# EAGLE board Main_Board (EAGLE 9.1.3), part 1 of 2
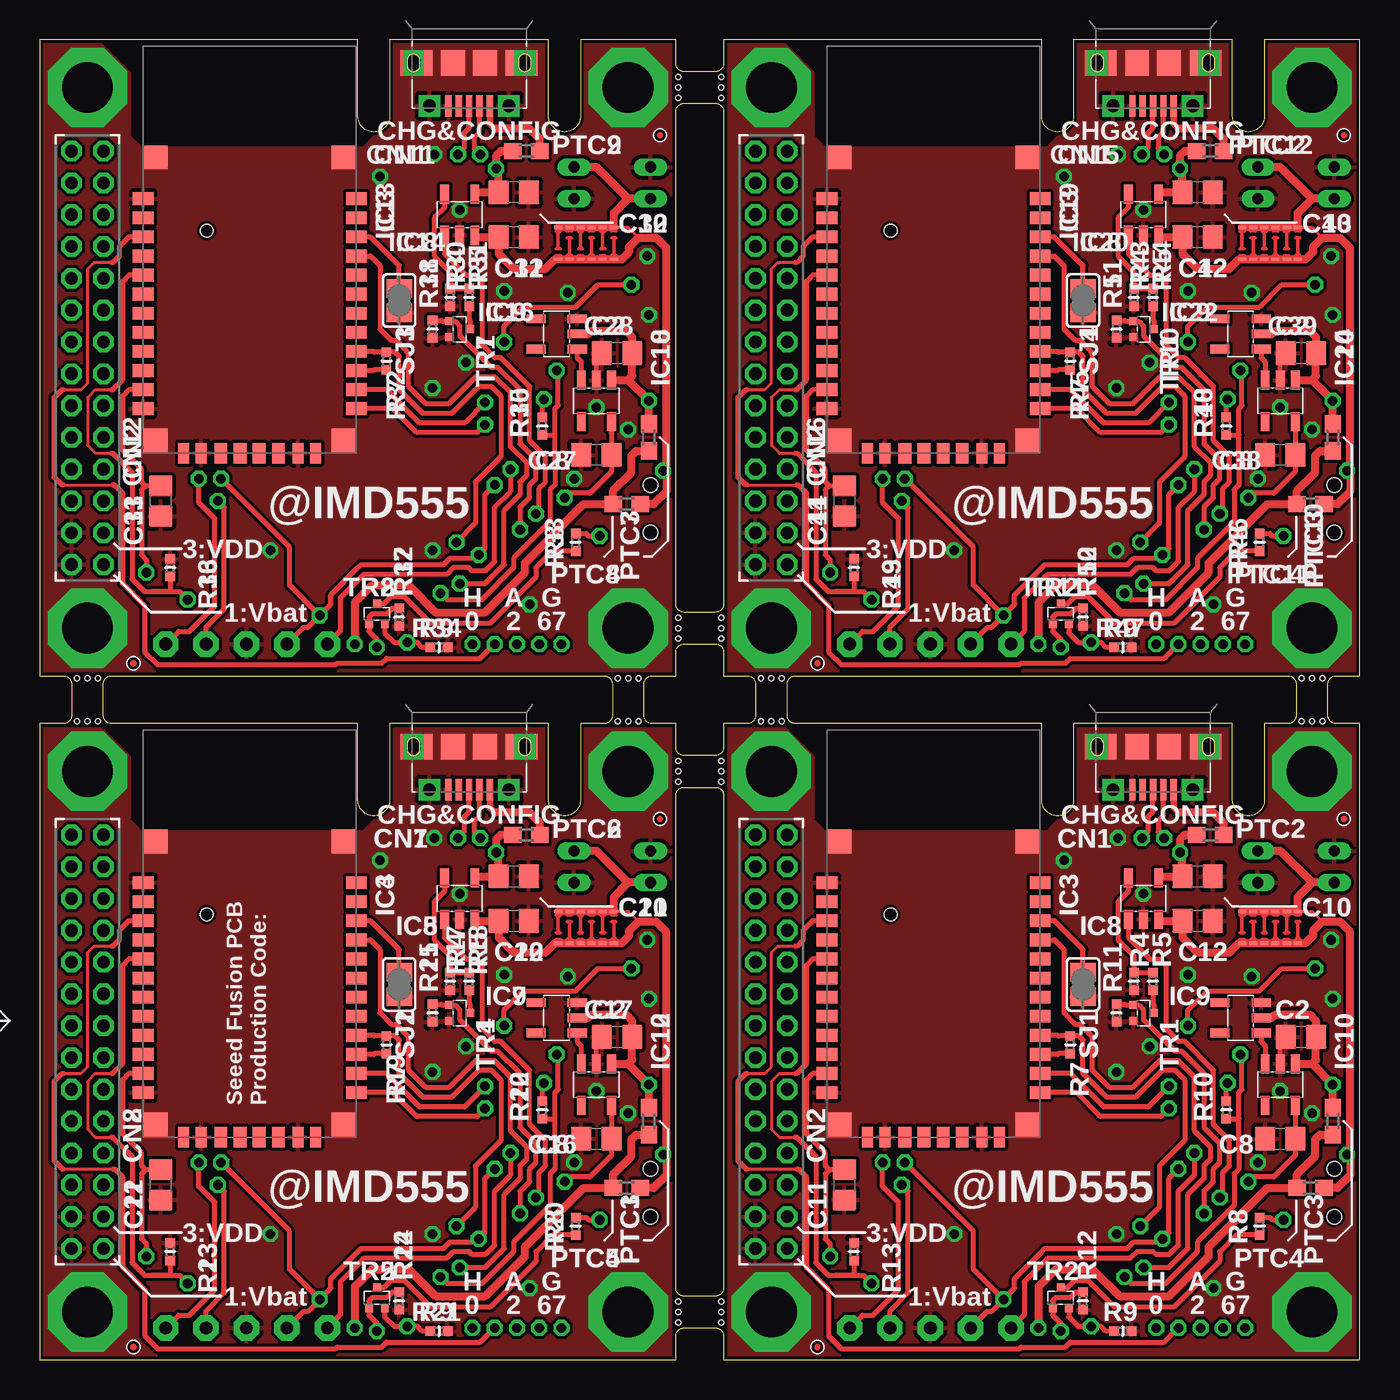
[diagram p0: board, top side]
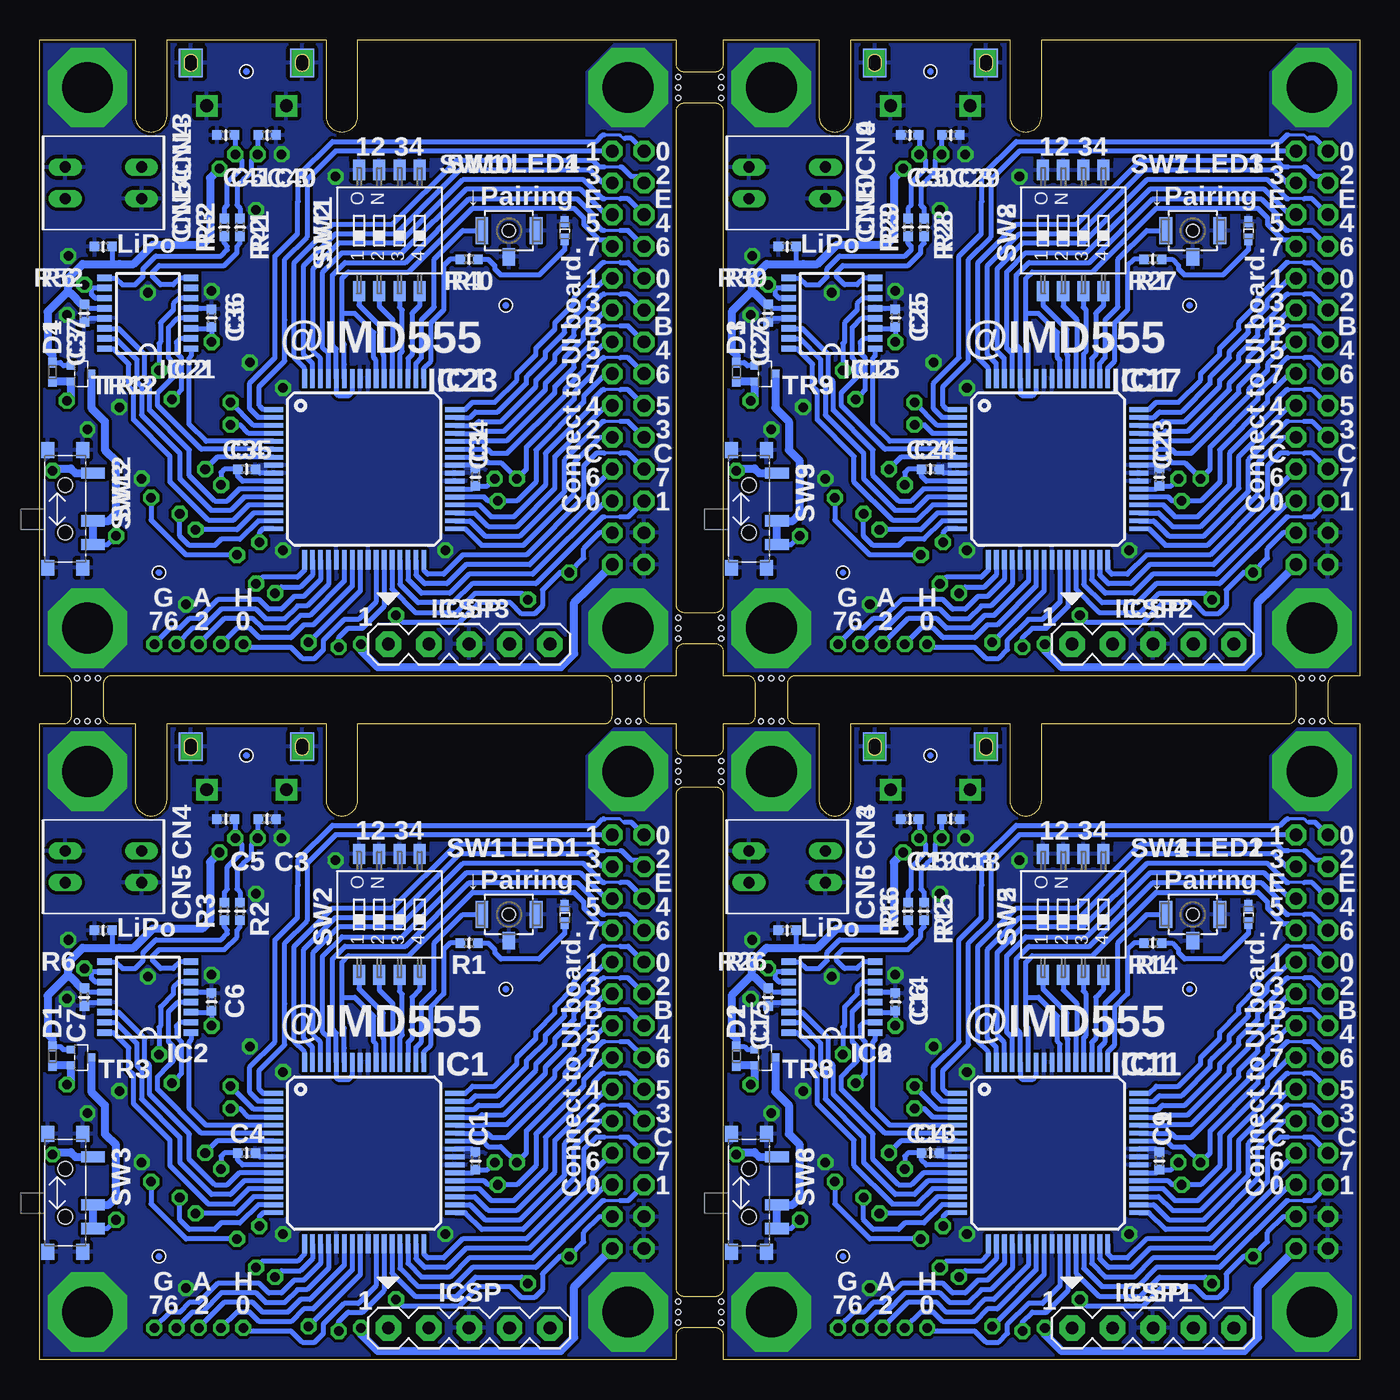
[diagram p1: board, bottom side, seen from below]

Size 83 x 83 mm. Coordinates in mm from the lower left corner, seen from the top.
Outline: 43,0 83,0 83,40 81.5,40 arc-90 81,40.5 81,42.5 arc-90 81.5,43 83,43 83,83 77,83 77,78.2 arc-90 76,77.2 arc-90 75,78.2 75,83 65,83 65,78.2 arc-90 64,77.2 arc-90 63,78.2 63,83 43,83 43,81.5 arc-90 42.5,81 40.5,81 arc-90 40,81.5 40,83 34,83 34,78.2 arc-90 33,77.2 arc-90 32,78.2 32,83 22,83 22,78.2 arc-90 21,77.2 arc-90 20,78.2 20,83 0,83 0,43 1.5,43 arc-90 2,42.5 2,40.5 arc-90 1.5,40 0,40 0,0 40,0 40,1.5 arc-90 40.5,2 42.5,2 arc-90 43,1.5 43,0
Outline: 44.5,40 43,40 43,38.5 arc-90 42.5,38 40.5,38 arc-90 40,38.5 40,40 38.5,40 arc-90 38,40.5 38,42.5 arc-90 38.5,43 40,43 40,44.5 arc-90 40.5,45 42.5,45 arc-90 43,44.5 43,43 44.5,43 arc-90 45,42.5 45,40.5 arc-90 44.5,40
Outline: 43,35.5 43,4.5 arc-90 42.5,4 40.5,4 arc-90 40,4.5 40,35.5 arc-90 40.5,36 42.5,36 arc-90 43,35.5
Outline: 4.5,40 arc-90 4,40.5 4,42.5 arc-90 4.5,43 35.5,43 arc-90 36,42.5 36,40.5 arc-90 35.5,40 34,40 34,35.2 arc-90 33,34.2 arc-90 32,35.2 32,40 22,40 22,35.2 arc-90 21,34.2 arc-90 20,35.2 20,40 4.5,40
Outline: 79,40.5 arc-90 78.5,40 77,40 77,35.2 arc-90 76,34.2 arc-90 75,35.2 75,40 65,40 65,35.2 arc-90 64,34.2 arc-90 63,35.2 63,40 47.5,40 arc-90 47,40.5 47,42.5 arc-90 47.5,43 78.5,43 arc-90 79,42.5 79,40.5
Outline: 40,47.5 40,78.5 arc-90 40.5,79 42.5,79 arc-90 43,78.5 43,47.5 arc-90 42.5,47 40.5,47 arc-90 40,47.5
Copper layers (1*16): Top 0.035mm / dielectric 1.5mm / Bottom 0.035mm
Design rules "SeeedStudio_2layer_DRU_no_angle_20140221_IMD555 *": minimum track width 0.2mm, minimum drill 0.3mm, track to track 0.2mm, track to pad 0.16mm, pad to pad 0.2mm, via to via 0.2mm, smd to smd 0mil, copper to edge 0.2mm, drill to drill 10mil, minimum pad ring 0.2mm, minimum via ring 0.2mm, stop-mask expansion 0.03mm, vias tented up to drill 5mm, thermal gap 10mil
Net classes: 1 Vbat: clearance 0.3 mm
Holes 0.3 mm at 42.85,37 42.85,3 40.15,3 40.15,37 3,40.15 37,40.15 80,40.15 46,40.15 40.15,46 40.15,80 42.85,80 42.85,46 80,42.85 46,42.85 3,42.85 37,42.85 2.35,40.15 36.35,40.15 79.35,40.15 45.35,40.15 79.35,42.85 45.35,42.85 2.35,42.85 36.35,42.85 3.65,40.15 37.65,40.15 80.65,40.15 46.65,40.15 80.65,42.85 46.65,42.85 3.65,42.85 37.65,42.85 42.85,36.35 42.85,2.35 40.15,2.35 40.15,36.35 40.15,45.35 40.15,79.35 42.85,79.35 42.85,45.35 42.85,37.65 42.85,3.65 40.15,3.65 40.15,37.65 40.15,46.65 40.15,80.65 42.85,80.65 42.85,46.65
tRestrict: area 0,39.8 to 83,43.2; area 39.8,0 to 43.2,83; area 46.8,33.4 to 64.8,40; area 3.8,33.4 to 21.8,40; area 3.8,76.4 to 21.8,83; area 46.8,76.4 to 64.8,83; 8 lines
bRestrict: area 39.8,0 to 43.2,83; area 0,39.8 to 83,43.2; area 46.8,33.4 to 64.8,40; area 3.8,33.4 to 21.8,40; area 3.8,76.4 to 21.8,83; area 46.8,76.4 to 64.8,83; 20 lines

## Footprints (pad centres in the part's own frame; a part is rotated, then mirrored left to right if it is on the bottom)
C0402-SS = smd 0.6 x 0.6: 1 -0.55,0; 2 0.55,0
C0805 = smd 1.3 x 1.5: 1 -0.95,0; 2 0.95,0
10118194-0001LF = smd 0.4 x 1.35: P$1 -1.3,4.15; P$2 -0.65,4.15; P$3 0,4.15; P$4 0.65,4.15; P$5 1.3,4.15 | smd 1.5 x 1.8 bottom: P$6 -3.5,1.45; P$7 3.5,1.45 | drill 0.8 pad 1.35 square: S1 -2.5,4.15; S2 2.5,4.15 | drill 0.8 pad 1.3 square: S3 -3.5,1.6; S4 -3.5,1.3; S9 3.5,1.6; S10 3.5,1.3 | smd 2 x 1.6: S5 -3.3,1.45; S8 3.3,1.45 | smd 1.5 x 1.6: S6 -1,1.45; S7 1,1.45
2MM_14X2_R = drill 0.8 pad 1.3 octagon: 1 13,1; 2 13,-1; 3 11,1; 4 11,-1; 5 9,1; 6 9,-1; 7 7,1; 8 7,-1; 9 5,1; 10 5,-1; 11 3,1; 12 3,-1; 13 1,1; 14 1,-1; 15 -1,1; 16 -1,-1; 17 -3,1; 18 -3,-1; 19 -5,1; 20 -5,-1; 21 -7,1; 22 -7,-1; 23 -9,1; 24 -9,-1; 25 -11,1; 26 -11,-1; 27 -13,1; 28 -13,-1
PH-2_S = drill 0.7 long: 1 1,0; 2 -1,0
VMN2 = smd 0.65 x 0.55: A 0.6,0; C -0.6,0
FUSE_PAT1 = smd 0.2 x 0.5: P$1 -1,0; P$2 1,0
TQFP64-10X10 = smd 1.2 x 0.3: 1 -5.7,3.75; 2 -5.7,3.25; 3 -5.7,2.75; 4 -5.7,2.25; 5 -5.7,1.75; 6 -5.7,1.25; 7 -5.7,0.75; 8 -5.7,0.25; 9 -5.7,-0.25; 10 -5.7,-0.75; 11 -5.7,-1.25; 12 -5.7,-1.75; 13 -5.7,-2.25; 14 -5.7,-2.75; 15 -5.7,-3.25; 16 -5.7,-3.75; 33 5.7,-3.75; 34 5.7,-3.25; 35 5.7,-2.75; 36 5.7,-2.25; 37 5.7,-1.75; 38 5.7,-1.25; 39 5.7,-0.75; 40 5.7,-0.25; 41 5.7,0.25; 42 5.7,0.75; 43 5.7,1.25; 44 5.7,1.75; 45 5.7,2.25; 46 5.7,2.75; 47 5.7,3.25; 48 5.7,3.75 | smd 0.3 x 1.2: 17 -3.75,-5.7; 18 -3.25,-5.7; 19 -2.75,-5.7; 20 -2.25,-5.7; 21 -1.75,-5.7; 22 -1.25,-5.7; 23 -0.75,-5.7; 24 -0.25,-5.7; 25 0.25,-5.7; 26 0.75,-5.7; 27 1.25,-5.7; 28 1.75,-5.7; 29 2.25,-5.7; 30 2.75,-5.7; 31 3.25,-5.7; 32 3.75,-5.7; 49 3.75,5.7; 50 3.25,5.7; 51 2.75,5.7; 52 2.25,5.7; 53 1.75,5.7; 54 1.25,5.7; 55 0.75,5.7; 56 0.25,5.7; 57 -0.25,5.7; 58 -0.75,5.7; 59 -1.25,5.7; 60 -1.75,5.7; 61 -2.25,5.7; 62 -2.75,5.7; 63 -3.25,5.7; 64 -3.75,5.7
SSOP16 = smd 0.914 x 0.406: 1 -2.718,2.223; 2 -2.718,1.587; 3 -2.718,0.953; 4 -2.718,0.318; 5 -2.718,-0.318; 6 -2.718,-0.953; 7 -2.718,-1.587; 8 -2.718,-2.223; 9 2.718,-2.223; 10 2.718,-1.587; 11 2.718,-0.953; 12 2.718,-0.318; 13 2.718,0.318; 14 2.718,0.953; 15 2.718,1.587; 16 2.718,2.223
RN-42 = smd 1.3 x 0.8: 1 -6.7,16; 2 -6.7,14.8; 3 -6.7,13.6; 4 -6.7,12.4; 5 -6.7,11.2; 6 -6.7,10; 7 -6.7,8.8; 8 -6.7,7.6; 9 -6.7,6.4; 10 -6.7,5.2; 11 -6.7,4; 12 -6.7,2.8; 13 6.7,2.8; 14 6.7,4; 15 6.7,5.2; 16 6.7,6.4; 17 6.7,7.6; 18 6.7,8.8; 19 6.7,10; 20 6.7,11.2; 21 6.7,12.4; 22 6.7,13.6; 23 6.7,14.8; 24 6.7,16 | smd 0.7 x 1.3: 28 3.05,0; 29 -3.05,0; 30 4.15,0; 35 -4.15,0 | smd 0.8 x 1.3: 31 1.8,0; 32 0.6,0; 33 -0.6,0; 34 -1.8,0 | smd 1.5 x 1.5: SHIELD -5.9,18.6; SHIELD@1 -5.9,0.8; SHIELD@2 5.9,0.8; SHIELD@3 5.9,18.6
SOT23-5L = smd 0.55 x 1.2: 1 -0.95,-1.3; 2 0,-1.3; 3 0.95,-1.3; 4 0.95,1.3; 5 -0.95,1.3
MA05-1 = drill 0.8 pad 1.6 octagon: 1 -5.08,0; 2 -2.54,0; 3 0,0; 4 2.54,0; 5 5.08,0
CHIP-LED1005 = smd 0.5 x 0.7: A 0,-0.55; C 0,0.55
R0603 = smd 1.1 x 1: 1 -0.85,0; 2 0.85,0
R0402-SS = smd 0.6 x 0.6: 1 -0.55,0; 2 0.55,0
SJ = smd 1.168 x 1.6: 1 -0.762,0; 2 0.762,0
B3U-1100P-B = smd 0.8 x 1.7: P$1 -1.7,0; P$2 1.7,0 | smd 0.8 x 1.1: P$3 0,-1.65 | hole 0.8: 0,0
CHS-04B = smd 0.76 x 1.27: 1 0,-3.81; 2 1.27,-3.81; 3 2.54,-3.81; 4 3.81,-3.81; 5 3.81,3.81; 6 2.54,3.81; 7 1.27,3.81; 8 0,3.81
MA12R = smd 0.7 x 1.5: P$1 -2.25,1.75; P$2 0.75,1.75; P$3 2.25,1.75 | smd 1 x 0.8: P$4 -3.7,1.1; P$5 -3.7,-1.1; P$6 3.7,-1.1; P$7 3.7,1.1 | hole 0.9: -1.5,0; 1.5,0
SOT523 = smd 0.5 x 0.5: 1 -0.5,-0.65; 2 0.5,-0.65; 3 0,0.65

## Placement (x,y rotation side)
C1  0.1u  [C0402-SS]  55.6,12.5 270 bottom
C2  4.7u  [C0805]  79.3,20.3 180 top
C3  47p  [C0402-SS]  71.3,34 180 bottom
C4  0.1u  [C0402-SS]  70,13 180 bottom
C5  47p  [C0402-SS]  68.7,34 0 bottom
C6  0.1u  [C0402-SS]  72.2,22.5 90 bottom
C7  0.1u  [C0402-SS]  80.2,22.8 270 bottom
C8  4.7u  [C0805]  78,13.9 180 top
C9  0.1u  [C0402-SS]  12.6,12.5 270 bottom
C10  4.7u  [C0805]  72.8,30.4 0 top
C11  4.7u  [C0805]  50.6,11 270 top
C12  4.7u  [C0805]  72.8,27.6 0 top
C13  0.1u  [C0402-SS]  27,13 180 bottom
C14  0.1u  [C0402-SS]  29.2,22.5 90 bottom
C15  0.1u  [C0402-SS]  37.2,22.8 270 bottom
C16  4.7u  [C0805]  35,13.9 180 top
C17  4.7u  [C0805]  36.3,20.3 180 top
C18  47p  [C0402-SS]  28.3,34 180 bottom
C19  47p  [C0402-SS]  25.7,34 0 bottom
C20  4.7u  [C0805]  29.8,27.6 0 top
C21  4.7u  [C0805]  29.8,30.4 0 top
C22  4.7u  [C0805]  7.6,11 270 top
C23  0.1u  [C0402-SS]  12.6,55.5 270 bottom
C24  0.1u  [C0402-SS]  27,56 180 bottom
C25  0.1u  [C0402-SS]  29.2,65.5 90 bottom
C26  0.1u  [C0402-SS]  37.2,65.8 270 bottom
C27  4.7u  [C0805]  35,56.9 180 top
C28  4.7u  [C0805]  36.3,63.3 180 top
C29  47p  [C0402-SS]  28.3,77 180 bottom
C30  47p  [C0402-SS]  25.7,77 0 bottom
C31  4.7u  [C0805]  29.8,70.6 0 top
C32  4.7u  [C0805]  29.8,73.4 0 top
C33  4.7u  [C0805]  7.6,54 270 top
C34  0.1u  [C0402-SS]  55.6,55.5 270 bottom
C35  0.1u  [C0402-SS]  70,56 180 bottom
C36  0.1u  [C0402-SS]  72.2,65.5 90 bottom
C37  0.1u  [C0402-SS]  80.2,65.8 270 bottom
C38  4.7u  [C0805]  78,56.9 180 top
C39  4.7u  [C0805]  79.3,63.3 180 top
C40  47p  [C0402-SS]  71.3,77 180 bottom
C41  47p  [C0402-SS]  68.7,77 0 bottom
C42  4.7u  [C0805]  72.8,70.6 0 top
C43  4.7u  [C0805]  72.8,73.4 0 top
C44  4.7u  [C0805]  50.6,54 270 top
CN1  microUSB  [10118194-0001LF]  70,40 180 top
CN2  2X14R  [2MM_14X2_R]  46,20 270 top
CN3  [PH-2_S]  33.6,31 90 bottom
CN4  [PH-2_S]  76.6,31 90 bottom
CN5  [PH-2_S]  81.4,31 270 bottom
CN6  [PH-2_S]  38.4,31 270 bottom
CN7  microUSB  [10118194-0001LF]  27,40 180 top
CN8  2X14R  [2MM_14X2_R]  3,20 270 top
CN9  [PH-2_S]  33.6,74 90 bottom
CN10  [PH-2_S]  38.4,74 270 bottom
CN11  microUSB  [10118194-0001LF]  27,83 180 top
CN12  2X14R  [2MM_14X2_R]  3,63 270 top
CN13  [PH-2_S]  76.6,74 90 bottom
CN14  [PH-2_S]  81.4,74 270 bottom
CN15  microUSB  [10118194-0001LF]  70,83 180 top
CN16  2X14R  [2MM_14X2_R]  46,63 270 top
D1  [VMN2]  82.2,19.1 90 bottom
D2  [VMN2]  39.2,19.1 90 bottom
D3  [VMN2]  39.2,62.1 90 bottom
D4  [VMN2]  82.2,62.1 90 bottom
F1  FUSEPAT0.2  [FUSE_PAT1]  78.4,27.2 90 top
F2  FUSEPAT0.2  [FUSE_PAT1]  77.7,27.2 270 top
F3  FUSEPAT0.2  [FUSE_PAT1]  77,27.2 90 top
F4  FUSEPAT0.2  [FUSE_PAT1]  76.3,27.2 270 top
F5  FUSEPAT0.2  [FUSE_PAT1]  75.6,27.2 90 top
F6  FUSEPAT0.2  [FUSE_PAT1]  79.1,27.2 270 top
F7  FUSEPAT0.2  [FUSE_PAT1]  35.4,27.2 90 top
F8  FUSEPAT0.2  [FUSE_PAT1]  34.7,27.2 270 top
F9  FUSEPAT0.2  [FUSE_PAT1]  34,27.2 90 top
F10  FUSEPAT0.2  [FUSE_PAT1]  33.3,27.2 270 top
F11  FUSEPAT0.2  [FUSE_PAT1]  32.6,27.2 90 top
F12  FUSEPAT0.2  [FUSE_PAT1]  36.1,27.2 270 top
F13  FUSEPAT0.2  [FUSE_PAT1]  35.4,70.2 90 top
F14  FUSEPAT0.2  [FUSE_PAT1]  34.7,70.2 270 top
F15  FUSEPAT0.2  [FUSE_PAT1]  34,70.2 90 top
F16  FUSEPAT0.2  [FUSE_PAT1]  33.3,70.2 270 top
F17  FUSEPAT0.2  [FUSE_PAT1]  32.6,70.2 90 top
F18  FUSEPAT0.2  [FUSE_PAT1]  36.1,70.2 270 top
F19  FUSEPAT0.2  [FUSE_PAT1]  78.4,70.2 90 top
F20  FUSEPAT0.2  [FUSE_PAT1]  77.7,70.2 270 top
F21  FUSEPAT0.2  [FUSE_PAT1]  77,70.2 90 top
F22  FUSEPAT0.2  [FUSE_PAT1]  76.3,70.2 270 top
F23  FUSEPAT0.2  [FUSE_PAT1]  75.6,70.2 90 top
F24  FUSEPAT0.2  [FUSE_PAT1]  79.1,70.2 270 top
IC1  PIC18LF67K40  [TQFP64-10X10]  62.6,13 0 bottom
IC2  FT230X  [SSOP16]  76.2,22.8 180 bottom
IC3  RN42  [RN-42]  56.2,14 0 top
IC4  RN42  [RN-42]  13.2,14 0 top
IC5  MCP73832  [SOT23-5L]  26.4,29 0 top
IC6  FT230X  [SSOP16]  33.2,22.8 180 bottom
IC7  BD4931G  [SOT23-5L]  32.5,21.5 90 top
IC8  MCP73832  [SOT23-5L]  69.4,29 0 top
IC9  BD4931G  [SOT23-5L]  75.5,21.5 90 top
IC10  NCP551  [SOT23-5L]  78,17.3 180 top
IC11  PIC18LF67K40  [TQFP64-10X10]  19.6,13 0 bottom
IC12  NCP551  [SOT23-5L]  35,17.3 180 top
IC13  RN42  [RN-42]  13.2,57 0 top
IC14  MCP73832  [SOT23-5L]  26.4,72 0 top
IC15  FT230X  [SSOP16]  33.2,65.8 180 bottom
IC16  BD4931G  [SOT23-5L]  32.5,64.5 90 top
IC17  PIC18LF67K40  [TQFP64-10X10]  19.6,56 0 bottom
IC18  NCP551  [SOT23-5L]  35,60.3 180 top
IC19  RN42  [RN-42]  56.2,57 0 top
IC20  MCP73832  [SOT23-5L]  69.4,72 0 top
IC21  FT230X  [SSOP16]  76.2,65.8 180 bottom
IC22  BD4931G  [SOT23-5L]  75.5,64.5 90 top
IC23  PIC18LF67K40  [TQFP64-10X10]  62.6,56 0 bottom
IC24  NCP551  [SOT23-5L]  78,60.3 180 top
ICSP  (Not mounting)  [MA05-1]  56,2 0 bottom
ICSP1  (Not mounting)  [MA05-1]  13,2 0 bottom
ICSP2  (Not mounting)  [MA05-1]  13,45 0 bottom
ICSP3  (Not mounting)  [MA05-1]  56,45 0 bottom
LED1  Blue  [CHIP-LED1005]  50,28 0 bottom
LED2  Blue  [CHIP-LED1005]  7,28 0 bottom
LED3  Blue  [CHIP-LED1005]  7,71 0 bottom
LED4  Blue  [CHIP-LED1005]  50,71 0 bottom
PTC1  250mA 100mA 0ZCM0010FF2G  [R0603]  38.3,15 270 top
PTC2  250mA 100mA 0ZCM0010FF2G  [R0603]  73.6,33 180 top
PTC3  250mA 100mA 0ZCM0010FF2G  [R0603]  81.3,15 270 top
PTC4  250mA 100mA 0ZCM0010FF2G  [R0603]  79.9,10.8 180 top
PTC5  250mA 100mA 0ZCM0010FF2G  [R0603]  36.9,10.8 180 top
PTC6  250mA 100mA 0ZCM0010FF2G  [R0603]  30.6,33 180 top
PTC7  250mA 100mA 0ZCM0010FF2G  [R0603]  38.3,58 270 top
PTC8  250mA 100mA 0ZCM0010FF2G  [R0603]  36.9,53.8 180 top
PTC9  250mA 100mA 0ZCM0010FF2G  [R0603]  30.6,76 180 top
PTC10  250mA 100mA 0ZCM0010FF2G  [R0603]  81.3,58 270 top
PTC11  250mA 100mA 0ZCM0010FF2G  [R0603]  79.9,53.8 180 top
PTC12  250mA 100mA 0ZCM0010FF2G  [R0603]  73.6,76 180 top
R1  1000 or 330  [R0402-SS]  56,26.2 0 bottom
R2  27  [R0402-SS]  70.4,28.2 90 bottom
R3  27  [R0402-SS]  71.4,28.2 90 bottom
R4  10k  [R0402-SS]  68.8,23.8 90 top
R5  3.3k  [R0402-SS]  70,23.8 90 top
R6  33k  [R0402-SS]  79,27 0 bottom
R7  10k  [R0402-SS]  64.8,19.8 270 top
R8  33k  [R0402-SS]  76.7,8.4 90 top
R9  10k  [R0402-SS]  68.1,1.8 180 top
R10  10k  [R0402-SS]  74.6,15.7 90 top
R11  100k  [R0402-SS]  67.7,21.8 90 top
R12  100k  [R0402-SS]  65.6,3.7 90 top
R13  100k  [R0402-SS]  51.2,6.8 90 top
R14  1000 or 330  [R0402-SS]  13,26.2 0 bottom
R15  27  [R0402-SS]  27.4,28.2 90 bottom
R16  27  [R0402-SS]  28.4,28.2 90 bottom
R17  10k  [R0402-SS]  25.8,23.8 90 top
R18  3.3k  [R0402-SS]  27,23.8 90 top
R19  10k  [R0402-SS]  21.8,19.8 270 top
R20  33k  [R0402-SS]  33.7,8.4 90 top
R21  10k  [R0402-SS]  25.1,1.8 180 top
R22  10k  [R0402-SS]  31.6,15.7 90 top
R23  100k  [R0402-SS]  8.2,6.8 90 top
R24  100k  [R0402-SS]  22.6,3.7 90 top
R25  100k  [R0402-SS]  24.7,21.8 90 top
R26  33k  [R0402-SS]  36,27 0 bottom
R27  1000 or 330  [R0402-SS]  13,69.2 0 bottom
R28  27  [R0402-SS]  27.4,71.2 90 bottom
R29  27  [R0402-SS]  28.4,71.2 90 bottom
R30  10k  [R0402-SS]  25.8,66.8 90 top
R31  3.3k  [R0402-SS]  27,66.8 90 top
R32  10k  [R0402-SS]  21.8,62.8 270 top
R33  33k  [R0402-SS]  33.7,51.4 90 top
R34  10k  [R0402-SS]  25.1,44.8 180 top
R35  10k  [R0402-SS]  31.6,58.7 90 top
R36  100k  [R0402-SS]  8.2,49.8 90 top
R37  100k  [R0402-SS]  22.6,46.7 90 top
R38  100k  [R0402-SS]  24.7,64.8 90 top
R39  33k  [R0402-SS]  36,70 0 bottom
R40  1000 or 330  [R0402-SS]  56,69.2 0 bottom
R41  27  [R0402-SS]  70.4,71.2 90 bottom
R42  27  [R0402-SS]  71.4,71.2 90 bottom
R43  10k  [R0402-SS]  68.8,66.8 90 top
R44  3.3k  [R0402-SS]  70,66.8 90 top
R45  10k  [R0402-SS]  64.8,62.8 270 top
R46  33k  [R0402-SS]  76.7,51.4 90 top
R47  10k  [R0402-SS]  68.1,44.8 180 top
R48  10k  [R0402-SS]  74.6,58.7 90 top
R49  100k  [R0402-SS]  51.2,49.8 90 top
R50  100k  [R0402-SS]  65.6,46.7 90 top
R51  100k  [R0402-SS]  67.7,64.8 90 top
R52  33k  [R0402-SS]  79,70 0 bottom
SJ1  (Don't short)  [SJ]  65.6,23.6 270 top
SJ2  (Don't short)  [SJ]  22.6,23.6 270 top
SJ3  (Don't short)  [SJ]  22.6,66.6 270 top
SJ4  (Don't short)  [SJ]  65.6,66.6 270 top
SW1  B3U-1100P-B  [B3U-1100P-B]  53.5,28 0 bottom
SW2  CHS-04B  [CHS-04B]  62.92,28 0 bottom
SW3  MA12R  [MA12R]  81.4,10.5 270 bottom
SW4  B3U-1100P-B  [B3U-1100P-B]  10.5,28 0 bottom
SW5  CHS-04B  [CHS-04B]  19.92,28 0 bottom
SW6  MA12R  [MA12R]  38.4,10.5 270 bottom
SW7  B3U-1100P-B  [B3U-1100P-B]  10.5,71 0 bottom
SW8  CHS-04B  [CHS-04B]  19.92,71 0 bottom
SW9  MA12R  [MA12R]  38.4,53.5 270 bottom
SW10  B3U-1100P-B  [B3U-1100P-B]  53.5,71 0 bottom
SW11  CHS-04B  [CHS-04B]  62.92,71 0 bottom
SW12  MA12R  [MA12R]  81.4,53.5 270 bottom
TR1  DMG1012T-7  [SOT523]  69.4,21.8 270 top
TR2  DMG1012T-7  [SOT523]  64.2,3.9 0 top
TR3  PMOSSOT523  [SOT523]  80.4,19 270 bottom
TR4  DMG1012T-7  [SOT523]  26.4,21.8 270 top
TR5  DMG1012T-7  [SOT523]  21.2,3.9 0 top
TR6  PMOSSOT523  [SOT523]  37.4,19 270 bottom
TR7  DMG1012T-7  [SOT523]  26.4,64.8 270 top
TR8  DMG1012T-7  [SOT523]  21.2,46.9 0 top
TR9  PMOSSOT523  [SOT523]  37.4,62 270 bottom
TR10  DMG1012T-7  [SOT523]  69.4,64.8 270 top
TR11  DMG1012T-7  [SOT523]  64.2,46.9 0 top
TR12  PMOSSOT523  [SOT523]  80.4,62 270 bottom
U$1  [PCB_CHECK]  48.9,0.8 0 top
U$2  [PCB_CHECK]  5.9,0.8 0 top
U$3  [PCB_CHECK]  82,34 0 top
U$4  [PCB_CHECK]  39,34 0 top
U$5  [PCB_CHECK]  32.5,6.5 0 bottom
U$6  [PCB_CHECK]  75.5,6.5 0 bottom
U$7  [PCB_CHECK]  10.7,23.3 0 bottom
U$8  [PCB_CHECK]  53.7,23.3 0 bottom
U$9  [PCB_CHECK]  70,38 0 bottom
U$10  [PCB_CHECK]  27,38 0 bottom
U$11  [PCB_CHECK]  5.9,43.8 0 top
U$12  [PCB_CHECK]  39,77 0 top
U$13  [PCB_CHECK]  32.5,49.5 0 bottom
U$14  [PCB_CHECK]  10.7,66.3 0 bottom
U$15  [PCB_CHECK]  27,81 0 bottom
U$16  [PCB_CHECK]  48.9,43.8 0 top
U$17  [PCB_CHECK]  82,77 0 top
U$18  [PCB_CHECK]  75.5,49.5 0 bottom
U$19  [PCB_CHECK]  53.7,66.3 0 bottom
U$20  [PCB_CHECK]  70,81 0 bottom

## Library data of the parts
C1-C44 PTC1-PTC12 R1-R52 = 2 RCL
CN1 CN7 CN11 CN15 IC1 IC3-IC5 IC7-IC14 IC16-IC20 IC22-IC24 LED1-LED4 SW1 SW3 SW4 SW6 SW7 SW9 SW10 SW12 TR1-TR12 U$1-U$20 = 0 my parts
CN2 CN8 CN12 CN16 = 4 _ll_ll_
CN3-CN6 CN9 CN10 CN13 CN14 = 4 CONNECTOR
D1-D4 = 5 D
F1-F24 = 3 FUSE
IC2 IC6 IC15 IC21 = ftdichip
ICSP ICSP1-ICSP3 = 4 _l__l_
SJ1-SJ4 = 3 JUMPER
SW2 SW5 SW8 SW11 = 3 switch-copal

## Nets
GND: C1.1 C2.2 C3.2 C4.1 C5.2 C6.2 C7.2 C8.2 C10.2 C11.2 C12.2 CN1.P$5 CN1.P$6 CN1.P$7 CN1.S1 CN1.S2 CN1.S3 CN1.S4 CN1.S5 CN1.S6 CN1.S7 CN1.S8 CN1.S9 CN1.S10 CN2.2 CN2.4 CN4.2 CN5.2 IC1.8 IC1.9 IC1.21 IC1.25 IC1.39 IC1.40 IC1.41 IC1.56 IC1.57 IC2.5 IC2.13 IC3.1 IC3.12 IC3.28 IC3.29 IC3.SHIELD IC3.SHIELD@1 IC3.SHIELD@2 IC3.SHIELD@3 IC8.2 IC9.3 IC10.2 ICSP.3 LED1.C R4.1 R6.1 R9.1 R11.1 R12.1 R13.2 SJ1.2 SW1.P$2 SW1.P$3 SW2.5 SW2.6 SW2.7 SW2.8 SW3.P$4 SW3.P$5 SW3.P$6 SW3.P$7 TR1.2
GND1: C9.1 C13.1 C14.2 C15.2 C16.2 C17.2 C18.2 C19.2 C20.2 C21.2 C22.2 CN3.2 CN6.2 CN7.P$5 CN7.P$6 CN7.P$7 CN7.S1 CN7.S2 CN7.S3 CN7.S4 CN7.S5 CN7.S6 CN7.S7 CN7.S8 CN7.S9 CN7.S10 CN8.2 CN8.4 IC4.1 IC4.12 IC4.28 IC4.29 IC4.SHIELD IC4.SHIELD@1 IC4.SHIELD@2 IC4.SHIELD@3 IC5.2 IC6.5 IC6.13 IC7.3 IC11.8 IC11.9 IC11.21 IC11.25 IC11.39 IC11.40 IC11.41 IC11.56 IC11.57 IC12.2 ICSP1.3 LED2.C R17.1 R21.1 R23.2 R24.1 R25.1 R26.1 SJ2.2 SW4.P$2 SW4.P$3 SW5.5 SW5.6 SW5.7 SW5.8 SW6.P$4 SW6.P$5 SW6.P$6 SW6.P$7 TR4.2
GND2: C23.1 C24.1 C25.2 C26.2 C27.2 C28.2 C29.2 C30.2 C31.2 C32.2 C33.2 CN9.2 CN10.2 CN11.P$5 CN11.P$6 CN11.P$7 CN11.S1 CN11.S2 CN11.S3 CN11.S4 CN11.S5 CN11.S6 CN11.S7 CN11.S8 CN11.S9 CN11.S10 CN12.2 CN12.4 IC13.1 IC13.12 IC13.28 IC13.29 IC13.SHIELD IC13.SHIELD@1 IC13.SHIELD@2 IC13.SHIELD@3 IC14.2 IC15.5 IC15.13 IC16.3 IC17.8 IC17.9 IC17.21 IC17.25 IC17.39 IC17.40 IC17.41 IC17.56 IC17.57 IC18.2 ICSP2.3 LED3.C R30.1 R34.1 R36.2 R37.1 R38.1 R39.1 SJ3.2 SW7.P$2 SW7.P$3 SW8.5 SW8.6 SW8.7 SW8.8 SW9.P$4 SW9.P$5 SW9.P$6 SW9.P$7 TR7.2
GND3: C34.1 C35.1 C36.2 C37.2 C38.2 C39.2 C40.2 C41.2 C42.2 C43.2 C44.2 CN13.2 CN14.2 CN15.P$5 CN15.P$6 CN15.P$7 CN15.S1 CN15.S2 CN15.S3 CN15.S4 CN15.S5 CN15.S6 CN15.S7 CN15.S8 CN15.S9 CN15.S10 CN16.2 CN16.4 IC19.1 IC19.12 IC19.28 IC19.29 IC19.SHIELD IC19.SHIELD@1 IC19.SHIELD@2 IC19.SHIELD@3 IC20.2 IC21.5 IC21.13 IC22.3 IC23.8 IC23.9 IC23.21 IC23.25 IC23.39 IC23.40 IC23.41 IC23.56 IC23.57 IC24.2 ICSP3.3 LED4.C R43.1 R47.1 R49.2 R50.1 R51.1 R52.1 SJ4.2 SW10.P$2 SW10.P$3 SW11.5 SW11.6 SW11.7 SW11.8 SW12.P$4 SW12.P$5 SW12.P$6 SW12.P$7 TR10.2
N$1: IC1.4 IC3.13
N$2: IC1.5 IC2.1
N$3: IC1.3 IC3.14
N$4: IC1.26
N$5: C5.1 CN1.P$3 R2.2
N$6: C3.1 CN1.P$2 R3.2
N$7: IC1.6 IC2.4
N$8 [Vbat]: CN2.1 PTC3.2 PTC4.2
N$9: C7.1 C10.1 D1.A IC2.12 IC8.4 PTC2.2 R6.2 TR3.1
N$10: IC1.15 IC8.1
N$11: IC11.7 ICSP1.1
N$12 [Vbat]: C12.1 CN4.1 CN5.1 F1.P$1 F1.P$2 F2.P$1 F2.P$2 F3.P$1 F3.P$2 F4.P$1 F4.P$2 F5.P$1 F5.P$2 F6.P$1 F6.P$2 IC8.3 PTC4.1 SW3.P$1
N$13 [Vbat]: R8.2 SW3.P$2 SW3.P$3 TR3.3
N$14: IC1.7 ICSP.1
N$15 [Vbat]: CN1.P$1 PTC2.1
N$16: IC4.14 IC11.3
N$17: IC4.13 IC11.4
N$18: IC6.4 IC11.6
N$19: IC6.1 IC11.5
N$20: IC11.52 SW5.3
N$21: IC11.51 SW5.4
N$22: IC11.50 SW4.P$1
N$23: IC11.53 SW5.2
N$24: IC11.54 SW5.1
N$25: IC11.49 R14.1
N$26: LED2.A R14.2
N$27: IC4.5 IC11.28 R23.1
N$28: IC6.9 R16.1
N$29: IC6.8 R15.1
N$30: C19.1 CN7.P$3 R15.2
N$31: C18.1 CN7.P$2 R16.2
N$32: IC6.15 IC11.12
N$33: IC6.16 IC11.13
N$34: IC1.54 SW2.1
N$35: IC1.52 SW2.3
N$36: IC5.5 R17.2 R18.2
N$37: IC11.14 R25.2 TR4.1
N$38: IC1.51 SW2.4
N$39: IC1.49 R1.1
N$40: IC1.28 IC3.5 R13.1
N$41: LED1.A R1.2
N$42: C6.1 IC2.3 IC2.10 IC2.11
N$43: IC1.50 SW1.P$1
N$44: IC2.9 R3.1
N$45: IC1.53 SW2.2
N$46: IC2.8 R2.1
N$47: C14.1 IC6.3 IC6.10 IC6.11
N$48: IC1.12 IC2.15
N$49: IC1.13 IC2.16
N$50: IC8.5 R4.2 R5.2
N$51: IC1.27 R12.2 TR2.1
N$52: IC1.16 IC3.16 R7.1
N$53: IC1.14 R11.2 TR1.1
N$54: IC3.15 R7.2
N$55: IC1.11 IC2.14
N$56: IC2.2 R10.2
N$57: IC1.18 IC2.6 R10.1
N$58: IC1.17 IC3.21
N$59: IC3.22 SJ1.1
N$60: IC4.15 R19.2
N$61: IC6.14 IC11.11
N$62: IC6.2 R22.2
N$63: IC4.16 IC11.16 R19.1
N$64: IC6.6 IC11.18 R22.1
N$65: IC4.22 SJ2.1
N$66: IC4.21 IC11.17
N$67: IC5.1 IC11.15
N$68: IC11.27 R24.2 TR5.1
N$69: IC7.1 IC12.3
N$70: IC9.1 IC10.3
N$71: R5.1 TR1.3
N$72: IC1.20
N$73: R8.1 TR2.3
N$74: IC1.24 R9.2 TR2.2
N$75: IC1.22
N$76: R18.1 TR4.3
N$77: R20.1 TR5.3
N$78: IC11.22
N$79: IC11.20
N$80: IC11.19
N$81: IC4.3 IC11.23
N$82: IC11.24 R21.2 TR5.2
N$83: IC11.26
N$84 [Vbat]: CN8.1 PTC1.2 PTC5.2
N$85 [Vbat]: C20.1 CN3.1 CN6.1 F7.P$1 F7.P$2 F8.P$1 F8.P$2 F9.P$1 F9.P$2 F10.P$1 F10.P$2 F11.P$1 F11.P$2 F12.P$1 F12.P$2 IC5.3 PTC5.1 SW6.P$1
N$86: C15.1 C21.1 D2.A IC5.4 IC6.12 PTC6.2 R26.2 TR6.1
N$87 [Vbat]: R20.2 SW6.P$2 SW6.P$3 TR6.3
N$88 [Vbat]: CN7.P$1 PTC6.1
N$89: IC17.7 ICSP2.1
N$90: IC13.14 IC17.3
N$91: IC13.13 IC17.4
N$92: IC15.4 IC17.6
N$93: IC15.1 IC17.5
N$94: IC17.52 SW8.3
N$95: IC1.19
N$96: IC1.23 IC3.3
N$97: IC17.51 SW8.4
N$98: IC17.50 SW7.P$1
N$99: IC17.53 SW8.2
N$100: IC17.54 SW8.1
N$101: IC17.49 R27.1
N$102: LED3.A R27.2
N$103: IC13.5 IC17.28 R36.1
N$104: IC15.9 R29.1
N$105: IC15.8 R28.1
N$106: C30.1 CN11.P$3 R28.2
N$107: C29.1 CN11.P$2 R29.2
N$108: IC15.15 IC17.12
N$109: IC15.16 IC17.13
N$110: IC14.5 R30.2 R31.2
N$111: IC17.14 R38.2 TR7.1
N$112: C25.1 IC15.3 IC15.10 IC15.11
N$113: IC13.15 R32.2
N$114: IC15.14 IC17.11
N$115: IC15.2 R35.2
N$116: IC13.16 IC17.16 R32.1
N$117: IC15.6 IC17.18 R35.1
N$118: IC13.22 SJ3.1
N$119: IC13.21 IC17.17
N$120: IC14.1 IC17.15
N$121: IC17.27 R37.2 TR8.1
N$122: IC16.1 IC18.3
N$123: R31.1 TR7.3
N$124: R33.1 TR8.3
N$125: IC17.22
N$126: IC17.20
N$127: IC17.19
N$128: IC13.3 IC17.23
N$129: IC17.24 R34.2 TR8.2
N$130: IC17.26
N$131 [Vbat]: CN12.1 PTC7.2 PTC8.2
N$132 [Vbat]: C31.1 CN9.1 CN10.1 F13.P$1 F13.P$2 F14.P$1 F14.P$2 F15.P$1 F15.P$2 F16.P$1 F16.P$2 F17.P$1 F17.P$2 F18.P$1 F18.P$2 IC14.3 PTC8.1 SW9.P$1
N$133: C26.1 C32.1 D3.A IC14.4 IC15.12 PTC9.2 R39.2 TR9.1
N$134 [Vbat]: R33.2 SW9.P$2 SW9.P$3 TR9.3
N$135 [Vbat]: CN11.P$1 PTC9.1
N$136: IC23.7 ICSP3.1
N$137: IC19.14 IC23.3
N$138: IC19.13 IC23.4
N$139: IC21.4 IC23.6
N$140: IC21.1 IC23.5
N$141: IC23.52 SW11.3
N$142: IC23.51 SW11.4
N$143: IC23.50 SW10.P$1
N$144: IC23.53 SW11.2
N$145: IC23.54 SW11.1
N$146: IC23.49 R40.1
N$147: LED4.A R40.2
N$148: IC19.5 IC23.28 R49.1
N$149: IC21.9 R42.1
N$150: IC21.8 R41.1
N$151: C41.1 CN15.P$3 R41.2
N$152: C40.1 CN15.P$2 R42.2
N$153: IC21.15 IC23.12
N$154: IC21.16 IC23.13
N$155: IC20.5 R43.2 R44.2
N$156: IC23.14 R51.2 TR10.1
N$157: C36.1 IC21.3 IC21.10 IC21.11
N$158: IC19.15 R45.2
N$159: IC21.14 IC23.11
N$160: IC21.2 R48.2
N$161: IC19.16 IC23.16 R45.1
N$162: IC21.6 IC23.18 R48.1
N$163: IC19.22 SJ4.1
N$164: IC19.21 IC23.17
N$165: IC20.1 IC23.15
N$166: IC23.27 R50.2 TR11.1
N$167: IC22.1 IC24.3
N$168: R44.1 TR10.3
N$169: R46.1 TR11.3
N$170: IC23.22
N$171: IC23.20
N$172: IC23.19
N$173: IC19.3 IC23.23
N$174: IC23.24 R47.2 TR11.2
N$175: IC23.26
N$176 [Vbat]: CN16.1 PTC10.2 PTC11.2
N$177 [Vbat]: C42.1 CN13.1 CN14.1 F19.P$1 F19.P$2 F20.P$1 F20.P$2 F21.P$1 F21.P$2 F22.P$1 F22.P$2 F23.P$1 F23.P$2 F24.P$1 F24.P$2 IC20.3 PTC11.1 SW12.P$1
N$178: C37.1 C43.1 D4.A IC20.4 IC21.12 PTC12.2 R52.2 TR12.1
N$179 [Vbat]: R46.2 SW12.P$2 SW12.P$3 TR12.3
N$180 [Vbat]: CN15.P$1 PTC12.1
RB0: CN2.20 IC1.48
RB1: CN2.19 IC1.47
RB2: CN2.18 IC1.46
RB3: CN2.17 IC1.45
RB4: CN2.16 IC1.44
RB5: CN2.15 IC1.43
RB6: CN2.14 IC1.42 ICSP.5
RB7: CN2.13 IC1.37 ICSP.4
RB8: CN8.20 IC11.48
RB9: CN8.19 IC11.47
RB10: CN8.18 IC11.46
RB11: CN8.17 IC11.45
RB12: CN8.16 IC11.44
RB13: CN8.15 IC11.43
RB14: CN8.14 IC11.42 ICSP1.5
RB15: CN8.13 IC11.37 ICSP1.4
RB16: CN12.20 IC17.48
RB17: CN12.19 IC17.47
RB18: CN12.18 IC17.46
RB19: CN12.17 IC17.45
RB20: CN12.16 IC17.44
RB21: CN12.15 IC17.43
RB22: CN12.14 IC17.42 ICSP2.5
RB23: CN12.13 IC17.37 ICSP2.4
RB24: CN16.20 IC23.48
RB25: CN16.19 IC23.47
RB26: CN16.18 IC23.46
RB27: CN16.17 IC23.45
RB28: CN16.16 IC23.44
RB29: CN16.15 IC23.43
RB30: CN16.14 IC23.42 ICSP3.5
RB31: CN16.13 IC23.37 ICSP3.4
RC0: CN2.5 IC1.30
RC1: CN2.6 IC1.29
RC2: CN2.9 IC1.33
RC3: CN2.10 IC1.34
RC4: CN2.11 IC1.35
RC5: CN2.12 IC1.36
RC6: CN2.7 IC1.31
RC7: CN2.8 IC1.32
RC8: CN8.12 IC11.36
RC9: CN8.11 IC11.35
RC10: CN8.10 IC11.34
RC11: CN8.9 IC11.33
RC12: CN8.8 IC11.32
RC13: CN8.7 IC11.31
RC14: CN8.5 IC11.30
RC15: CN8.6 IC11.29
RC16: CN12.12 IC17.36
RC17: CN12.11 IC17.35
RC18: CN12.10 IC17.34
RC19: CN12.9 IC17.33
RC20: CN12.8 IC17.32
RC21: CN12.7 IC17.31
RC22: CN12.5 IC17.30
RC23: CN12.6 IC17.29
RC24: CN16.12 IC23.36
RC25: CN16.11 IC23.35
RC26: CN16.10 IC23.34
RC27: CN16.9 IC23.33
RC28: CN16.8 IC23.32
RC29: CN16.7 IC23.31
RC30: CN16.5 IC23.30
RC31: CN16.6 IC23.29
RE0: CN2.28 IC1.2
RE1: CN2.27 IC1.1
RE2: CN2.26 IC1.64
RE3: CN2.25 IC1.63
RE4: CN2.24 IC1.62
RE5: CN2.23 IC1.61
RE6: CN2.22 IC1.58 IC1.60
RE7: CN2.21 IC1.55 IC1.59
RE8: CN8.21 IC11.55 IC11.59
RE9: CN8.22 IC11.58 IC11.60
RE10: CN8.23 IC11.61
RE11: CN8.24 IC11.62
RE12: CN8.25 IC11.63
RE13: CN8.26 IC11.64
RE14: CN8.27 IC11.1
RE15: CN8.28 IC11.2
RE16: CN12.21 IC17.55 IC17.59
RE17: CN12.22 IC17.58 IC17.60
RE18: CN12.23 IC17.61
RE19: CN12.24 IC17.62
RE20: CN12.25 IC17.63
RE21: CN12.26 IC17.64
RE22: CN12.27 IC17.1
RE23: CN12.28 IC17.2
RE24: CN16.21 IC23.55 IC23.59
RE25: CN16.22 IC23.58 IC23.60
RE26: CN16.23 IC23.61
RE27: CN16.24 IC23.62
RE28: CN16.25 IC23.63
RE29: CN16.26 IC23.64
RE30: CN16.27 IC23.1
RE31: CN16.28 IC23.2
VBAT [Vbat]: C2.1 D1.C IC9.2 IC10.1 PTC3.1 TR3.2
VBAT1 [Vbat]: C17.1 D2.C IC7.2 IC12.1 PTC1.1 TR6.2
VBAT2 [Vbat]: C28.1 D3.C IC16.2 IC18.1 PTC7.1 TR9.2
VBAT3 [Vbat]: C39.1 D4.C IC22.2 IC24.1 PTC10.1 TR12.2
VDD: C1.2 C4.2 C8.1 C11.1 CN2.3 IC1.10 IC1.38 IC3.11 IC10.5 ICSP.2
VDD1: C9.2 C13.2 C16.1 C22.1 CN8.3 IC4.11 IC11.10 IC11.38 IC12.5 ICSP1.2
VDD2: C23.2 C24.2 C27.1 C33.1 CN12.3 IC13.11 IC17.10 IC17.38 IC18.5 ICSP2.2
VDD3: C34.2 C35.2 C38.1 C44.1 CN16.3 IC19.11 IC23.10 IC23.38 IC24.5 ICSP3.2

## Tracks (layer width: path | path; a pad name or v marks a point on that pad's centre or on a via)
GND  (via drill 0.6, 3.2 pad 5)
  Top 0.3: IC10.2 78,19.95 C2.2
  Bottom 0.3: IC1.9 69.15,12.75 69.4,13 C4.1 | C1.1 55.8,13.25 IC1.41 | C7.2 79.97,22.48 IC2.13 | IC2.5 72.27,23.12 C6.2
  other vias: 64.4,31.4 67.7,18.1 57.5,7.9 67.7,7.9 72.2,24.2 73.8,4.5 81.2,26.4 67.8,32.8 80,37 46,37 46,3 80,3 80,15.5 69.8,19.7 76.2,24.1 69.4,29.3 81.3,22.7 78,16.9 76.6,12.4
  pour Bottom: 43,40 83,40 83,0 43,0
  pour Top: 43,40 83,40 83,0 43,0
GND1  (via drill 0.6, 3.2 pad 5)
  Top 0.3: IC12.2 35,19.95 C17.2
  Bottom 0.3: IC11.9 26.15,12.75 26.4,13 C13.1 | C9.1 12.8,13.25 IC11.41 | C15.2 36.97,22.48 IC6.13 | IC6.5 29.27,23.12 C14.2
  other vias: 21.4,31.4 24.7,18.1 14.5,7.9 24.7,7.9 29.2,24.2 30.8,4.5 38.2,26.4 24.8,32.8 37,37 3,37 3,3 37,3 37,15.5 26.8,19.7 33.2,24.1 26.4,29.3 38.3,22.7 35,16.9 33.6,12.4
  pour Bottom: 0,40 40,40 40,0 0,0
  pour Top: 0,40 40,40 40,0 0,0
GND2  (via drill 0.6, 3.2 pad 5)
  Top 0.3: IC18.2 35,62.95 C28.2
  Bottom 0.3: IC17.9 26.15,55.75 26.4,56 C24.1 | C23.1 12.8,56.25 IC17.41 | C26.2 36.97,65.48 IC15.13 | IC15.5 29.27,66.12 C25.2
  other vias: 21.4,74.4 24.7,61.1 14.5,50.9 24.7,50.9 29.2,67.2 30.8,47.5 38.2,69.4 24.8,75.8 37,80 3,80 3,46 37,46 37,58.5 26.8,62.7 33.2,67.1 26.4,72.3 38.3,65.7 35,59.9 33.6,55.4
  pour Bottom: 0,83 40,83 40,43 0,43
  pour Top: 0,83 40,83 40,43 0,43
GND3  (via drill 0.6, 3.2 pad 5)
  Top 0.3: IC24.2 78,62.95 C39.2
  Bottom 0.3: IC23.9 69.15,55.75 69.4,56 C35.1 | C34.1 55.8,56.25 IC23.41 | C37.2 79.97,65.48 IC21.13 | IC21.5 72.27,66.12 C36.2
  other vias: 64.4,74.4 67.7,61.1 57.5,50.9 67.7,50.9 72.2,67.2 73.8,47.5 81.2,69.4 67.8,75.8 80,80 46,80 46,46 80,46 80,58.5 69.8,62.7 76.2,67.1 69.4,72.3 81.3,65.7 78,59.9 76.6,55.4
  pour Bottom: 43,83 83,83 83,43 43,43
  pour Top: 43,83 83,83 83,43 43,43
N$1  (via drill 0.6)
  Top 0.3: IC3.13 65.2,16.8 66.7,15.3 70.5,15.3 v71,15.8
  Bottom 0.3: IC1.4 69.85,15.25 70.4,15.8 v71,15.8
N$2
  Bottom 0.3: IC1.5 72.55,14.75 73.6,15.8 73.6,20 73.48,20.12 IC2.1
N$3  (via drill 0.6)
  Top 0.3: IC3.14 64.8,18 66.9,15.9 69.7,15.9 v71,17.2
  Bottom 0.3: IC1.3 69.55,15.75 v71,17.2
N$4  (via drill 0.6)
  Bottom 0.3: IC1.26 61.85,4.65 62.95,3.55 63.85,3.55 65.15,2.25 65.15,1.65 65.7,1.1 66.5,1.1 67.2,1.8 70,1.8 v70.2,2
N$5  (via drill 0.6)
  Top 0.3: v69.3,32.8 69.67,33.17 69.67,34.12 70,34.45 CN1.P$3
  Bottom 0.3: C5.1 69.3,33.95 v69.3,32.8 69.7,32.4 69.7,31.7 70,31.4 70.2,31.2 70.6,30.8 70.6,29.6 70.4,29.4 R2.2
N$6  (via drill 0.6)
  Top 0.3: v70.7,32.8 70.33,33.17 70.33,33.88 70.65,34.2 CN1.P$2
  Bottom 0.3: C3.1 70.7,33.95 v70.7,32.8 70.3,32.4 70.3,31.9 71.2,31 71.2,29.6 71.4,29.4 R3.2
N$7
  Bottom 0.3: IC2.4 74.32,22.48 74.9,21.9 74.9,21.1 74.9,20 74.6,19.7 74.6,18.8 74.9,18.5 75.6,17.8 75.6,17 72.85,14.25 IC1.6
N$8  (via drill 0.6)
  Top 0.5: v62.8,2 62.8,4.6 63.9,5.7 66.2,5.7 67.9,4 71,4 73.5,6.5 73.5,7.1 77.2,10.8 PTC4.2 79.05,11.65 80.2,12.8 80.2,13.85 80.5,14.15 PTC3.2
  Bottom 0.5: v62.8,2 62.8,1.6 61.75,0.55 50.25,0.55 49.4,1.4 49.4,4.6 48.5,5.5 CN2.1
N$9  (via drill 0.6)
  Top 0.5: IC8.4 70.45,30.4 C10.1 71.85,31.75 v71.7,31.9 71.7,32.4 71.7,32.7 72,33 PTC2.2
  Bottom 0.3: IC2.12 79.97,23.12 C7.1 | D1.A 81.7,19.7 81.5,19.5 TR3.1 | R6.2 78.45,25.9
  Bottom 0.5: 78,25.9 80.3,25.9 81.2,25 81.2,24.5 81.2,24.2 | 78,25.9 77.1,25.9 75.9,27.1 72.8,27.1 72.3,27.6 72.3,31.3 v71.7,31.9 | 81.2,24.2 81,24 80.35,23.35 C7.1 | 81.2,24.2 82.5,22.9 82.5,20.5 82.2,20.2 D1.A | 78.45,25.9 78,25.9
N$10  (via drill 0.6)
  Top 0.3: IC8.1 68.45,26.55 69.8,25.2 70.4,25.2 70.8,24.8 70.8,20.82 71.61,20.01 71.99,20.01 73.8,18.2 73.8,14.8 74.8,13.8 74.8,12.2 74.4,11.8 74.4,10.4 v74.2,10.2
  Bottom 0.3: IC1.15 69.25,9.75 70.4,8.6 71.6,8.6 72,8.2 73.6,8.2 74.2,8.8 v74.2,10.2
N$11  (via drill 0.6)
  Top 0.3: v29.6,13 29.6,11.6 28.6,10.6 28.6,7.2 28,6.6 27.2,6.6 27,6.8 26,6.8 25.6,6.4 24,6.4 23.1,6.4 20.4,6.4 20.2,6.2 18.9,4.9 18.9,2.82 ICSP1.1
  Bottom 0.3: v29.6,13 28.85,13.75 IC11.7
N$12  (via drill 0.6 pad 1)
  Top 0.2: F6.P$1 80,28.2 80.65,27.55
  Top 0.5: IC8.3 70.45,27.6 C12.1 71.85,26.55 72.8,25.6 74.8,25.6 75.4,26.2 F5.P$1 F4.P$2 F3.P$1 F2.P$2 F1.P$1 F6.P$2 79.6,26.2 80.05,26.65 80.05,26.95 80.65,27.55 81.75,27.55 82.1,27.2 82.4,26.9 82.4,13.1 v82.2,12.9 82.4,12.7 82.4,11.6 81.6,10.8 PTC4.1 | CN5.1 80,30 | 80,30 78,32 CN4.1 | F5.P$2 F4.P$1 F3.P$2 F2.P$1 F1.P$2 F6.P$1 79.1,29.1 80,30
  Bottom 0.5: v82.2,12.9 82.05,13.05 81.05,13.05 80.75,12.75 SW3.P$1
N$13  (via drill 0.6 pad 1)
  Top 0.3: v78.2,8.8 77.5,8.8 77.35,8.95 R8.2
  Bottom 0.3: v78.2,8.8 78.75,8.25 SW3.P$3
  Bottom 0.5: SW3.P$3 SW3.P$2 78.65,9.75 78.2,10.2 78.2,13.5 78.9,14.2 78.9,16 79.75,16.85 TR3.3
N$14  (via drill 0.6)
  Top 0.3: v72.6,13 72.6,11.6 71.6,10.6 71.6,7.2 71,6.6 70.2,6.6 70,6.8 69,6.8 68.6,6.4 67,6.4 66.1,6.4 63.4,6.4 63.2,6.2 61.9,4.9 61.9,2.82 ICSP.1
  Bottom 0.3: v72.6,13 71.85,13.75 IC1.7
N$15
  Top 0.4: 71.6,34.4 71.3,34.7 CN1.P$1
  Top 0.5: 71.6,34.4 73.8,34.4 74.45,33.75 PTC2.1
N$16  (via drill 0.6)
  Top 0.3: IC4.14 21.8,18 23.9,15.9 26.7,15.9 v28,17.2
  Bottom 0.3: IC11.3 26.55,15.75 v28,17.2
N$17  (via drill 0.6)
  Top 0.3: IC4.13 22.2,16.8 23.7,15.3 27.5,15.3 v28,15.8
  Bottom 0.3: IC11.4 26.85,15.25 27.4,15.8 v28,15.8
N$18
  Bottom 0.3: IC6.4 31.32,22.48 31.9,21.9 31.9,21.1 31.9,20 31.6,19.7 31.6,18.8 31.9,18.5 32.6,17.8 32.6,17 29.85,14.25 IC11.6
N$19
  Bottom 0.3: IC11.5 29.55,14.75 30.6,15.8 30.6,20 30.48,20.12 IC6.1
N$20
  Bottom 0.3: IC11.52 17.35,20.25 17.2,20.4 17.2,23 17.38,23.18 SW5.3
N$21
  Bottom 0.3: IC11.51 16.85,19.95 16.6,20.2 16.6,22.8 16.11,23.29 SW5.4
N$22
  Bottom 0.3: IC11.50 16.35,19.65 16,20 16,22.4 15.2,23.2 15.2,26.2 13.4,28 SW4.P$1
N$23
  Bottom 0.3: SW5.2 18.65,23.25 17.8,22.4 17.8,20.6 17.85,20.55 IC11.53
N$24
  Bottom 0.3: SW5.1 19.92,23.32 18.4,21.8 18.4,20.2 18.35,20.15 IC11.54
N$25
  Bottom 0.3: IC11.49 15.85,19.35 15.4,19.8 15.4,22.2 14.6,23 14.6,25.8 14.25,26.15 14.2,26.2 R14.1
N$26
  Bottom 0.3: LED2.A 7,26.8 8.6,25.2 11,25.2 11.4,25.6 11.4,25.8 11.8,26.2 R14.2
N$27  (via drill 0.6)
  Top 0.2: 4.5,18 3.5,18 3,17.5 3,14.5 3.5,14 4.5,14
  Top 0.3: IC4.5 5.6,25.2 5.2,24.8 5.2,18.6 4.6,18 4.5,18 | 7,5.3 6.6,5.3 5.8,6.1 5.8,12.8 4.6,14 4.5,14 | 7,5.3 8.8,5.3 v9.3,4.8 | R23.1 8.2,5.3 7,5.3
  Bottom 0.3: IC11.28 17.85,5.45 16.4,4 13.8,4 12.6,5.2 9.7,5.2 v9.3,4.8
N$28
  Bottom 0.3: IC6.9 35.22,25.02 34.8,24.6 34,24.6 33.5,25.1 33.5,25.6 32.7,26.4 28.6,26.4 28.2,26.8 28.2,27 28.4,27.2 R16.1
N$29
  Bottom 0.3: IC6.8 31.18,25.02 31.6,24.6 32.4,24.6 32.9,25.1 32.9,25.4 32.5,25.8 28.4,25.8 27.6,26.6 27.6,27 27.4,27.2 R15.1
N$30  (via drill 0.6)
  Top 0.3: v26.3,32.8 26.68,33.17 26.68,34.12 27,34.45 CN7.P$3
  Bottom 0.3: C19.1 26.3,33.95 v26.3,32.8 26.7,32.4 26.7,31.7 27,31.4 27.2,31.2 27.6,30.8 27.6,29.6 27.4,29.4 R15.2
N$31  (via drill 0.6)
  Top 0.3: v27.7,32.8 27.32,33.17 27.32,33.88 27.65,34.2 CN7.P$2
  Bottom 0.3: C18.1 27.7,33.95 v27.7,32.8 27.3,32.4 27.3,31.9 28.2,31 28.2,29.6 28.4,29.4 R16.2
N$32
  Bottom 0.3: IC11.12 27.15,11.25 28,10.4 29.2,10.4 31.2,12.4 31.2,14 33.6,16.4 33.6,18.2 33.9,18.5 33.9,19 33.9,19.9 35.21,21.21 IC6.15
N$33
  Bottom 0.3: IC11.13 26.85,10.75 27.8,9.8 29.4,9.8 31.8,12.2 31.8,13.8 34.1,16.1 34.1,17.9 34.4,18.2 34.4,19.6 35.38,20.58 IC6.16
N$34
  Bottom 0.3: SW2.1 62.92,23.32 61.4,21.8 61.4,20.2 61.35,20.15 IC1.54
N$35
  Bottom 0.3: IC1.52 60.35,20.25 60.2,20.4 60.2,23 60.38,23.18 SW2.3
N$36
  Top 0.3: R18.2 R17.2 25.8,25.4 24.8,26.4 24.8,28.8 25.45,29.45 IC5.5
N$37  (via drill 0.6)
  Top 0.3: v30.2,9.2 30.2,10.6 30.8,11.2 30.8,12 31.2,12.4 31.2,13.6 30.2,14.6 30.2,18 28.8,19.4 28.4,19.4 26.4,21.4 26.4,22 26.1,22.3 TR4.1 25.3,22.3 25.25,22.35 R25.2
  Bottom 0.3: IC11.14 26.55,10.25 27.6,9.2 v30.2,9.2
N$38
  Bottom 0.3: IC1.51 59.85,19.95 59.6,20.2 59.6,22.8 59.11,23.29 SW2.4
N$39
  Bottom 0.3: IC1.49 58.85,19.35 58.4,19.8 58.4,22.2 57.6,23 57.6,25.8 57.25,26.15 57.2,26.2 R1.1
N$40  (via drill 0.6)
  Top 0.2: 47.5,18 46.5,18 46,17.5 46,14.5 46.5,14 47.5,14
  Top 0.3: IC3.5 48.6,25.2 48.2,24.8 48.2,18.6 47.6,18 47.5,18 | 50,5.3 49.6,5.3 48.8,6.1 48.8,12.8 47.6,14 47.5,14 | 50,5.3 51.8,5.3 v52.3,4.8 | R13.1 51.2,5.3 50,5.3
  Bottom 0.3: IC1.28 60.85,5.45 59.4,4 56.8,4 55.6,5.2 52.7,5.2 v52.3,4.8
N$41
  Bottom 0.3: LED1.A 50,26.8 51.6,25.2 54,25.2 54.4,25.6 54.4,25.8 54.8,26.2 R1.2
N$42  (via drill 0.6)
  Top 0.3: v80.2,24.6 78.1,24.6 76.7,23.2 73.4,23.2 72.2,22 v72.2,21
  Bottom 0.3: v80.2,24.6 79.99,24.39 IC2.10 79.75,24.39 79.75,24 79.51,23.75 IC2.11 | v72.2,21 C6.1 72.3,21.85 IC2.3
N$43
  Bottom 0.3: IC1.50 59.35,19.65 59,20 59,22.4 58.2,23.2 58.2,26.2 56.4,28 SW1.P$1
N$44
  Bottom 0.3: IC2.9 78.22,25.02 77.8,24.6 77,24.6 76.5,25.1 76.5,25.6 75.7,26.4 71.6,26.4 71.2,26.8 71.2,27 71.4,27.2 R3.1
N$45
  Bottom 0.3: SW2.2 61.65,23.25 60.8,22.4 60.8,20.6 60.85,20.55 IC1.53
N$46
  Bottom 0.3: IC2.8 74.18,25.02 74.6,24.6 75.4,24.6 75.9,25.1 75.9,25.4 75.5,25.8 71.4,25.8 70.6,26.6 70.6,27 70.4,27.2 R2.1
N$47  (via drill 0.6)
  Top 0.3: v37.2,24.6 35.1,24.6 33.7,23.2 30.4,23.2 29.2,22 v29.2,21
  Bottom 0.3: v37.2,24.6 36.99,24.39 IC6.10 36.76,24.39 36.76,24 36.51,23.75 IC6.11 | v29.2,21 C14.1 29.3,21.85 IC6.3
N$48
  Bottom 0.3: IC1.12 70.15,11.25 71,10.4 72.2,10.4 74.2,12.4 74.2,14 76.6,16.4 76.6,18.2 76.9,18.5 76.9,19 76.9,19.9 78.21,21.21 IC2.15
N$49
  Bottom 0.3: IC1.13 69.85,10.75 70.8,9.8 72.4,9.8 74.8,12.2 74.8,13.8 77.1,16.1 77.1,17.9 77.4,18.2 77.4,19.6 78.38,20.58 IC2.16
N$50
  Top 0.3: R5.2 R4.2 68.8,25.4 67.8,26.4 67.8,28.8 68.45,29.45 IC8.5
N$51  (via drill 0.6)
  Top 0.3: v64.2,1.8 64.2,2.3 63.7,2.8 TR2.1 63.7,3.7 63.9,3.9 64.8,3.9 65.15,4.25 R12.2
  Bottom 0.3: IC1.27 61.35,4.35 62.7,3 63.6,3 64.2,2.4 v64.2,1.8
N$52  (via drill 0.6)
  Top 0.3: v69.2,8.4 70.4,9.6 70.4,12.2 72,13.8 72,17.6 71.4,18.2 70.6,18.2 68.9,16.5 67.1,16.5 65.6,18 65.6,20.1 65.35,20.35 R7.1 64.05,20.35 64,20.4 IC3.16
  Bottom 0.3: IC1.16 68.95,9.25 69.2,9 v69.2,8.4
N$53  (via drill 0.6)
  Top 0.3: v73.2,9.2 73.2,10.6 73.8,11.2 73.8,12 74.2,12.4 74.2,13.6 73.2,14.6 73.2,18 71.8,19.4 71.4,19.4 69.4,21.4 69.4,22 69.1,22.3 TR1.1 68.3,22.3 68.25,22.35 R11.2
  Bottom 0.3: IC1.14 69.55,10.25 70.6,9.2 v73.2,9.2
N$54
  Top 0.3: IC3.15 64,19.2 64.05,19.25 R7.2
N$55
  Bottom 0.3: IC1.11 70.45,11.75 71.2,11 72,11 73.6,12.6 73.6,14.2 76.1,16.7 76.1,18.5 76.4,18.8 76.4,20.2 78.05,21.85 IC2.14
N$56  (via drill 0.6)
  Top 0.3: v74.7,17.4 74.6,17.3 R10.2
  Bottom 0.3: IC2.2 74.19,21.21 74.4,21 74.4,20.9 74.4,20.3 74.1,20 74.1,18 74.4,17.7 v74.7,17.4
N$57  (via drill 0.6)
  Top 0.3: v68.2,5.2 68.6,4.8 70.8,4.8 72.8,6.8 72.8,7.4 75.1,9.7 75.1,11.7 75.4,12 75.4,13.3 | 75.4,16.8 75.4,15.15 R10.1 | 75.4,16.8 75.6,17 75.6,19.1 v75.5,19.2 | 75.4,14 75.4,13.3 | 75.4,13.3 75.4,16.8
  Bottom 0.3: IC2.6 74.25,23.75 74.6,23.4 74.6,23 75.4,22.2 75.4,21 75.5,20.9 v75.5,19.2 | v68.2,5.2 67.8,5.6 66.6,5.6 65.85,6.35 IC1.18
N$58  (via drill 0.6)
  Top 0.3: IC3.21 63.8,26.4 64.4,25.8 64.4,21.8 65.1,21.1 65.4,21.1 65.9,20.6 66.2,20.3 66.2,18.2 67.3,17.1 68.7,17.1 70.4,18.8 70.5,18.8 71.6,18.8 72.6,17.8 72.6,14.4 73.6,13.4 73.6,12.6 73.2,12.2 73.2,11.4 72.2,10.4 72.2,7 71,5.8 v69.4,5.8
  Bottom 0.3: IC1.17 66.35,6.65 66.8,6.2 69,6.2 v69.4,5.8
N$59
  Top 0.3: SJ1.1 65.6,25.8 63.8,27.6 IC3.22
N$60
  Top 0.3: IC4.15 21,19.2 21.05,19.25 R19.2
N$61
  Bottom 0.3: IC11.11 27.45,11.75 28.2,11 29,11 30.6,12.6 30.6,14.2 33.1,16.7 33.1,18.5 33.4,18.8 33.4,20.2 35.05,21.85 IC6.14
N$62  (via drill 0.6)
  Top 0.3: v31.7,17.4 31.6,17.3 R22.2
  Bottom 0.3: IC6.2 31.19,21.21 31.4,21 31.4,20.9 31.4,20.3 31.1,20 31.1,18 31.4,17.7 v31.7,17.4
N$63  (via drill 0.6)
  Top 0.3: v26.2,8.4 27.4,9.6 27.4,12.2 29,13.8 29,17.6 28.4,18.2 27.6,18.2 25.9,16.5 24.1,16.5 22.6,18 22.6,20.1 22.35,20.35 R19.1 21.05,20.35 21,20.4 IC4.16
  Bottom 0.3: IC11.16 25.95,9.25 26.2,9 v26.2,8.4
N$64  (via drill 0.6)
  Top 0.3: v25.2,5.2 25.6,4.8 27.8,4.8 29.8,6.8 29.8,7.4 32.1,9.7 32.1,11.7 32.4,12 32.4,13.3 | 32.4,16.8 32.4,15.15 R22.1 | 32.4,16.8 32.6,17 32.6,19.1 v32.5,19.2 | 32.4,14 32.4,13.3 | 32.4,13.3 32.4,16.8
  Bottom 0.3: IC6.6 31.25,23.75 31.6,23.4 31.6,23 32.4,22.2 32.4,21 32.5,20.9 v32.5,19.2 | v25.2,5.2 24.8,5.6 23.6,5.6 22.85,6.35 IC11.18
N$65
  Top 0.3: SJ2.1 22.6,25.8 20.8,27.6 IC4.22
N$66  (via drill 0.6)
  Top 0.3: IC4.21 20.8,26.4 21.4,25.8 21.4,21.8 22.1,21.1 22.4,21.1 22.9,20.6 23.2,20.3 23.2,18.2 24.3,17.1 25.7,17.1 27.4,18.8 27.5,18.8 28.6,18.8 29.6,17.8 29.6,14.4 30.6,13.4 30.6,12.6 30.2,12.2 30.2,11.4 29.2,10.4 29.2,7 28,5.8 v26.4,5.8
  Bottom 0.3: IC11.17 23.35,6.65 23.8,6.2 26,6.2 v26.4,5.8
N$67  (via drill 0.6)
  Top 0.3: IC5.1 25.45,26.55 26.8,25.2 27.4,25.2 27.8,24.8 27.8,20.82 28.61,20.01 28.99,20.01 30.8,18.2 30.8,14.8 31.8,13.8 31.8,12.2 31.4,11.8 31.4,10.4 v31.2,10.2
  Bottom 0.3: IC11.15 26.25,9.75 27.4,8.6 28.6,8.6 29,8.2 30.6,8.2 31.2,8.8 v31.2,10.2
N$68  (via drill 0.6)
  Top 0.3: v21.2,1.8 21.2,2.3 20.7,2.8 TR5.1 20.7,3.7 20.9,3.9 21.8,3.9 22.15,4.25 R24.2
  Bottom 0.3: IC11.27 18.35,4.35 19.7,3 20.6,3 21.2,2.4 v21.2,1.8
N$69
  Top 0.3: IC7.1 33.8,20 34.05,19.75 IC12.3
N$70
  Top 0.3: IC9.1 76.8,20 77.05,19.75 IC10.3
N$71
  Top 0.3: R5.1 70,22.4 70.05,22.35 TR1.3
N$72  (via drill 0.6)
  Bottom 0.3: IC1.20 64.85,5.75 66.2,4.4 66.8,4.4 67.6,3.6 68.8,3.6 69.4,4.2 71.6,4.2 72.8,3 73.4,3 v74.4,2
N$73
  Top 0.3: TR2.3 64.65,4.55 65.1,5 65.9,5 67.6,3.3 71.3,3.3 74.2,6.2 74.2,6.8 75.25,7.85 R8.1
N$74  (via drill 0.6)
  Top 0.3: TR2.2 64.7,2.7 65.3,2.1 v66.1,2.1 66.75,2.1 67.05,1.8 R9.2
  Bottom 0.3: IC1.24 62.85,5.7 62.85,5.35 v66.1,2.1
N$75  (via drill 0.6)
  Bottom 0.3: IC1.22 63.85,5.95 66,3.8 66.6,3.8 67.4,3 69,3 69.6,3.6 71.4,3.6 v73,2
N$76
  Top 0.3: R18.1 27,22.4 27.05,22.35 TR4.3
N$77
  Top 0.3: TR5.3 21.65,4.55 22.1,5 22.9,5 24.6,3.3 28.3,3.3 31.2,6.2 31.2,6.8 32.25,7.85 R20.1
N$78  (via drill 0.6)
  Bottom 0.3: IC11.22 20.85,5.95 23,3.8 23.6,3.8 24.4,3 26,3 26.6,3.6 28.4,3.6 v30,2
N$79  (via drill 0.6)
  Bottom 0.3: IC11.20 21.85,5.75 23.2,4.4 23.8,4.4 24.6,3.6 25.8,3.6 26.4,4.2 28.6,4.2 29.8,3 30.4,3 v31.4,2
N$80  (via drill 0.6)
  Bottom 0.3: IC11.19 22.35,6.05 23.4,5 24,5 24.8,4.2 25.6,4.2 26.2,4.8 28.8,4.8 30,3.6 30.6,3.6 31.2,3 31.8,3 v32.8,2
N$81  (via drill 0.6)
  Top 0.2: 4.5,26 3.5,26 3.4,26 3,25.6 3,25.4 3,19 3,18.4 2.6,18 1.5,18 | 1.5,12 4.6,12
  Top 0.3: IC4.3 5.6,27.6 5,27 5,26.5 5,26.4 4.6,26 4.5,26 | 1.5,12 1.4,12 0.9,12.5 0.9,17.4 0.9,17.5 1.4,18 1.5,18 | 4.6,12 4.7,12 5.2,11.5 5.2,7.4 5.2,5.8 6.6,4.4 6.6,1.5 7.4,0.7 18.6,0.7 18.7,0.8 21.5,0.8 21.8,1.1 27.7,1.1 v28.6,2
  Bottom 0.3: IC11.23 20.35,5.65 22.8,3.2 23.4,3.2 24.2,2.4 26.2,2.4 26.8,3 27.6,3 v28.6,2
N$82  (via drill 0.6)
  Top 0.3: TR5.2 21.7,2.7 22.3,2.1 v23.1,2.1 23.75,2.1 24.05,1.8 R21.2
  Bottom 0.3: IC11.24 19.85,5.7 19.85,5.35 v23.1,2.1
N$83  (via drill 0.6)
  Bottom 0.3: IC11.26 18.85,4.65 19.95,3.55 20.85,3.55 22.15,2.25 22.15,1.65 22.7,1.1 23.5,1.1 24.2,1.8 27,1.8 v27.2,2
N$84  (via drill 0.6)
  Top 0.5: v19.8,2 19.8,4.6 20.9,5.7 23.2,5.7 24.9,4 28,4 30.5,6.5 30.5,7.1 34.2,10.8 PTC5.2 36.05,11.65 37.2,12.8 37.2,13.85 37.5,14.15 PTC1.2
  Bottom 0.5: v19.8,2 19.8,1.6 18.75,0.55 7.25,0.55 6.4,1.4 6.4,4.6 5.5,5.5 CN8.1
N$85  (via drill 0.6 pad 1)
  Top 0.2: F12.P$1 37,28.2 37.65,27.55
  Top 0.5: IC5.3 27.45,27.6 C20.1 28.85,26.55 29.8,25.6 31.8,25.6 32.4,26.2 F11.P$1 F10.P$2 F9.P$1 F8.P$2 F7.P$1 F12.P$2 36.6,26.2 37.05,26.65 37.05,26.95 37.65,27.55 38.75,27.55 39.1,27.2 39.4,26.9 39.4,13.1 v39.2,12.9 39.4,12.7 39.4,11.6 38.6,10.8 PTC5.1 | CN6.1 37,30 | 37,30 35,32 CN3.1 | F11.P$2 F10.P$1 F9.P$2 F8.P$1 F7.P$2 F12.P$1 36.1,29.1 37,30
  Bottom 0.5: v39.2,12.9 39.05,13.05 38.05,13.05 37.75,12.75 SW6.P$1
N$86  (via drill 0.6)
  Top 0.5: IC5.4 27.45,30.4 C21.1 28.85,31.75 v28.7,31.9 28.7,32.4 28.7,32.7 29,33 PTC6.2
  Bottom 0.3: IC6.12 36.97,23.12 C15.1 | D2.A 38.7,19.7 38.5,19.5 TR6.1 | R26.2 35.45,25.9
  Bottom 0.5: 35,25.9 37.3,25.9 38.2,25 38.2,24.5 38.2,24.2 | 35,25.9 34.1,25.9 32.9,27.1 29.8,27.1 29.3,27.6 29.3,31.3 v28.7,31.9 | 38.2,24.2 38,24 37.35,23.35 C15.1 | 38.2,24.2 39.5,22.9 39.5,20.5 39.2,20.2 D2.A | 35.45,25.9 35,25.9
N$87  (via drill 0.6 pad 1)
  Top 0.3: v35.2,8.8 34.5,8.8 34.35,8.95 R20.2
  Bottom 0.3: v35.2,8.8 35.75,8.25 SW6.P$3
  Bottom 0.5: SW6.P$3 SW6.P$2 35.65,9.75 35.2,10.2 35.2,13.5 35.9,14.2 35.9,16 36.75,16.85 TR6.3
N$88
  Top 0.4: 28.6,34.4 28.3,34.7 CN7.P$1
  Top 0.5: 28.6,34.4 30.8,34.4 31.45,33.75 PTC6.1
N$89  (via drill 0.6)
  Top 0.3: v29.6,56 29.6,54.6 28.6,53.6 28.6,50.2 28,49.6 27.2,49.6 27,49.8 26,49.8 25.6,49.4 24,49.4 23.1,49.4 20.4,49.4 20.2,49.2 18.9,47.9 18.9,45.82 ICSP2.1
  Bottom 0.3: v29.6,56 28.85,56.75 IC17.7
N$90  (via drill 0.6)
  Top 0.3: IC13.14 21.8,61 23.9,58.9 26.7,58.9 v28,60.2
  Bottom 0.3: IC17.3 26.55,58.75 v28,60.2
N$91  (via drill 0.6)
  Top 0.3: IC13.13 22.2,59.8 23.7,58.3 27.5,58.3 v28,58.8
  Bottom 0.3: IC17.4 26.85,58.25 27.4,58.8 v28,58.8
N$92
  Bottom 0.3: IC15.4 31.32,65.48 31.9,64.9 31.9,64.1 31.9,63 31.6,62.7 31.6,61.8 31.9,61.5 32.6,60.8 32.6,60 29.85,57.25 IC17.6
N$93
  Bottom 0.3: IC17.5 29.55,57.75 30.6,58.8 30.6,63 30.48,63.12 IC15.1
N$94
  Bottom 0.3: IC17.52 17.35,63.25 17.2,63.4 17.2,66 17.38,66.18 SW8.3
N$95  (via drill 0.6)
  Bottom 0.3: IC1.19 65.35,6.05 66.4,5 67,5 67.8,4.2 68.6,4.2 69.2,4.8 71.8,4.8 73,3.6 73.6,3.6 74.2,3 74.8,3 v75.8,2
N$96  (via drill 0.6)
  Top 0.2: 47.5,26 46.5,26 46.4,26 46,25.6 46,25.4 46,19 46,18.4 45.6,18 44.5,18 | 44.5,12 47.6,12
  Top 0.3: IC3.3 48.6,27.6 48,27 48,26.5 48,26.4 47.6,26 47.5,26 | 44.5,12 44.4,12 43.9,12.5 43.9,17.4 43.9,17.5 44.4,18 44.5,18 | 47.6,12 47.7,12 48.2,11.5 48.2,7.4 48.2,5.8 49.6,4.4 49.6,1.5 50.4,0.7 61.6,0.7 61.7,0.8 64.5,0.8 64.8,1.1 70.7,1.1 v71.6,2
  Bottom 0.3: IC1.23 63.35,5.65 65.8,3.2 66.4,3.2 67.2,2.4 69.2,2.4 69.8,3 70.6,3 v71.6,2
N$97
  Bottom 0.3: IC17.51 16.85,62.95 16.6,63.2 16.6,65.8 16.11,66.29 SW8.4
N$98
  Bottom 0.3: IC17.50 16.35,62.65 16,63 16,65.4 15.2,66.2 15.2,69.2 13.4,71 SW7.P$1
N$99
  Bottom 0.3: SW8.2 18.65,66.25 17.8,65.4 17.8,63.6 17.85,63.55 IC17.53
N$100
  Bottom 0.3: SW8.1 19.92,66.32 18.4,64.8 18.4,63.2 18.35,63.15 IC17.54
N$101
  Bottom 0.3: IC17.49 15.85,62.35 15.4,62.8 15.4,65.2 14.6,66 14.6,68.8 14.25,69.15 14.2,69.2 R27.1
N$102
  Bottom 0.3: LED3.A 7,69.8 8.6,68.2 11,68.2 11.4,68.6 11.4,68.8 11.8,69.2 R27.2
N$103  (via drill 0.6)
  Top 0.2: 4.5,61 3.5,61 3,60.5 3,57.5 3.5,57 4.5,57
  Top 0.3: IC13.5 5.6,68.2 5.2,67.8 5.2,61.6 4.6,61 4.5,61 | 7,48.3 6.6,48.3 5.8,49.1 5.8,55.8 4.6,57 4.5,57 | 7,48.3 8.8,48.3 v9.3,47.8 | R36.1 8.2,48.3 7,48.3
  Bottom 0.3: IC17.28 17.85,48.45 16.4,47 13.8,47 12.6,48.2 9.7,48.2 v9.3,47.8
N$104
  Bottom 0.3: IC15.9 35.22,68.02 34.8,67.6 34,67.6 33.5,68.1 33.5,68.6 32.7,69.4 28.6,69.4 28.2,69.8 28.2,70 28.4,70.2 R29.1
N$105
  Bottom 0.3: IC15.8 31.18,68.02 31.6,67.6 32.4,67.6 32.9,68.1 32.9,68.4 32.5,68.8 28.4,68.8 27.6,69.6 27.6,70 27.4,70.2 R28.1
N$106  (via drill 0.6)
  Top 0.3: v26.3,75.8 26.68,76.17 26.68,77.12 27,77.45 CN11.P$3
  Bottom 0.3: C30.1 26.3,76.95 v26.3,75.8 26.7,75.4 26.7,74.7 27,74.4 27.2,74.2 27.6,73.8 27.6,72.6 27.4,72.4 R28.2
N$107  (via drill 0.6)
  Top 0.3: v27.7,75.8 27.32,76.17 27.32,76.88 27.65,77.2 CN11.P$2
  Bottom 0.3: C29.1 27.7,76.95 v27.7,75.8 27.3,75.4 27.3,74.9 28.2,74 28.2,72.6 28.4,72.4 R29.2
N$108
  Bottom 0.3: IC17.12 27.15,54.25 28,53.4 29.2,53.4 31.2,55.4 31.2,57 33.6,59.4 33.6,61.2 33.9,61.5 33.9,62 33.9,62.9 35.21,64.21 IC15.15
N$109
  Bottom 0.3: IC17.13 26.85,53.75 27.8,52.8 29.4,52.8 31.8,55.2 31.8,56.8 34.1,59.1 34.1,60.9 34.4,61.2 34.4,62.6 35.38,63.58 IC15.16
N$110
  Top 0.3: R31.2 R30.2 25.8,68.4 24.8,69.4 24.8,71.8 25.45,72.45 IC14.5
N$111  (via drill 0.6)
  Top 0.3: v30.2,52.2 30.2,53.6 30.8,54.2 30.8,55 31.2,55.4 31.2,56.6 30.2,57.6 30.2,61 28.8,62.4 28.4,62.4 26.4,64.4 26.4,65 26.1,65.3 TR7.1 25.3,65.3 25.25,65.35 R38.2
  Bottom 0.3: IC17.14 26.55,53.25 27.6,52.2 v30.2,52.2
N$112  (via drill 0.6)
  Top 0.3: v37.2,67.6 35.1,67.6 33.7,66.2 30.4,66.2 29.2,65 v29.2,64
  Bottom 0.3: v37.2,67.6 36.99,67.39 IC15.10 36.76,67.39 36.76,67 36.51,66.75 IC15.11 | v29.2,64 C25.1 29.3,64.85 IC15.3
N$113
  Top 0.3: IC13.15 21,62.2 21.05,62.25 R32.2
N$114
  Bottom 0.3: IC17.11 27.45,54.75 28.2,54 29,54 30.6,55.6 30.6,57.2 33.1,59.7 33.1,61.5 33.4,61.8 33.4,63.2 35.05,64.85 IC15.14
N$115  (via drill 0.6)
  Top 0.3: v31.7,60.4 31.6,60.3 R35.2
  Bottom 0.3: IC15.2 31.19,64.21 31.4,64 31.4,63.9 31.4,63.3 31.1,63 31.1,61 31.4,60.7 v31.7,60.4
N$116  (via drill 0.6)
  Top 0.3: v26.2,51.4 27.4,52.6 27.4,55.2 29,56.8 29,60.6 28.4,61.2 27.6,61.2 25.9,59.5 24.1,59.5 22.6,61 22.6,63.1 22.35,63.35 R32.1 21.05,63.35 21,63.4 IC13.16
  Bottom 0.3: IC17.16 25.95,52.25 26.2,52 v26.2,51.4
N$117  (via drill 0.6)
  Top 0.3: v25.2,48.2 25.6,47.8 27.8,47.8 29.8,49.8 29.8,50.4 32.1,52.7 32.1,54.7 32.4,55 32.4,56.3 | 32.4,59.8 32.4,58.15 R35.1 | 32.4,59.8 32.6,60 32.6,62.1 v32.5,62.2 | 32.4,57 32.4,56.3 | 32.4,56.3 32.4,59.8
  Bottom 0.3: IC15.6 31.25,66.75 31.6,66.4 31.6,66 32.4,65.2 32.4,64 32.5,63.9 v32.5,62.2 | v25.2,48.2 24.8,48.6 23.6,48.6 22.85,49.35 IC17.18
N$118
  Top 0.3: SJ3.1 22.6,68.8 20.8,70.6 IC13.22
N$119  (via drill 0.6)
  Top 0.3: IC13.21 20.8,69.4 21.4,68.8 21.4,64.8 22.1,64.1 22.4,64.1 22.9,63.6 23.2,63.3 23.2,61.2 24.3,60.1 25.7,60.1 27.4,61.8 27.5,61.8 28.6,61.8 29.6,60.8 29.6,57.4 30.6,56.4 30.6,55.6 30.2,55.2 30.2,54.4 29.2,53.4 29.2,50 28,48.8 v26.4,48.8
  Bottom 0.3: IC17.17 23.35,49.65 23.8,49.2 26,49.2 v26.4,48.8
N$120  (via drill 0.6)
  Top 0.3: IC14.1 25.45,69.55 26.8,68.2 27.4,68.2 27.8,67.8 27.8,63.82 28.61,63.01 28.99,63.01 30.8,61.2 30.8,57.8 31.8,56.8 31.8,55.2 31.4,54.8 31.4,53.4 v31.2,53.2
  Bottom 0.3: IC17.15 26.25,52.75 27.4,51.6 28.6,51.6 29,51.2 30.6,51.2 31.2,51.8 v31.2,53.2
N$121  (via drill 0.6)
  Top 0.3: v21.2,44.8 21.2,45.3 20.7,45.8 TR8.1 20.7,46.7 20.9,46.9 21.8,46.9 22.15,47.25 R37.2
  Bottom 0.3: IC17.27 18.35,47.35 19.7,46 20.6,46 21.2,45.4 v21.2,44.8
N$122
  Top 0.3: IC16.1 33.8,63 34.05,62.75 IC18.3
N$123
  Top 0.3: R31.1 27,65.4 27.05,65.35 TR7.3
N$124
  Top 0.3: TR8.3 21.65,47.55 22.1,48 22.9,48 24.6,46.3 28.3,46.3 31.2,49.2 31.2,49.8 32.25,50.85 R33.1
N$125  (via drill 0.6)
  Bottom 0.3: IC17.22 20.85,48.95 23,46.8 23.6,46.8 24.4,46 26,46 26.6,46.6 28.4,46.6 v30,45
N$126  (via drill 0.6)
  Bottom 0.3: IC17.20 21.85,48.75 23.2,47.4 23.8,47.4 24.6,46.6 25.8,46.6 26.4,47.2 28.6,47.2 29.8,46 30.4,46 v31.4,45
N$127  (via drill 0.6)
  Bottom 0.3: IC17.19 22.35,49.05 23.4,48 24,48 24.8,47.2 25.6,47.2 26.2,47.8 28.8,47.8 30,46.6 30.6,46.6 31.2,46 31.8,46 v32.8,45
N$128  (via drill 0.6)
  Top 0.2: 4.5,69 3.5,69 3.4,69 3,68.6 3,68.4 3,62 3,61.4 2.6,61 1.5,61 | 1.5,55 4.6,55
  Top 0.3: IC13.3 5.6,70.6 5,70 5,69.5 5,69.4 4.6,69 4.5,69 | 1.5,55 1.4,55 0.9,55.5 0.9,60.4 0.9,60.5 1.4,61 1.5,61 | 4.6,55 4.7,55 5.2,54.5 5.2,50.4 5.2,48.8 6.6,47.4 6.6,44.5 7.4,43.7 18.6,43.7 18.7,43.8 21.5,43.8 21.8,44.1 27.7,44.1 v28.6,45
  Bottom 0.3: IC17.23 20.35,48.65 22.8,46.2 23.4,46.2 24.2,45.4 26.2,45.4 26.8,46 27.6,46 v28.6,45
N$129  (via drill 0.6)
  Top 0.3: TR8.2 21.7,45.7 22.3,45.1 v23.1,45.1 23.75,45.1 24.05,44.8 R34.2
  Bottom 0.3: IC17.24 19.85,48.7 19.85,48.35 v23.1,45.1
N$130  (via drill 0.6)
  Bottom 0.3: IC17.26 18.85,47.65 19.95,46.55 20.85,46.55 22.15,45.25 22.15,44.65 22.7,44.1 23.5,44.1 24.2,44.8 27,44.8 v27.2,45
N$131  (via drill 0.6)
  Top 0.5: v19.8,45 19.8,47.6 20.9,48.7 23.2,48.7 24.9,47 28,47 30.5,49.5 30.5,50.1 34.2,53.8 PTC8.2 36.05,54.65 37.2,55.8 37.2,56.85 37.5,57.15 PTC7.2
  Bottom 0.5: v19.8,45 19.8,44.6 18.75,43.55 7.25,43.55 6.4,44.4 6.4,47.6 5.5,48.5 CN12.1
N$132  (via drill 0.6 pad 1)
  Top 0.2: F18.P$1 37,71.2 37.65,70.55
  Top 0.5: IC14.3 27.45,70.6 C31.1 28.85,69.55 29.8,68.6 31.8,68.6 32.4,69.2 F17.P$1 F16.P$2 F15.P$1 F14.P$2 F13.P$1 F18.P$2 36.6,69.2 37.05,69.65 37.05,69.95 37.65,70.55 38.75,70.55 39.1,70.2 39.4,69.9 39.4,56.1 v39.2,55.9 39.4,55.7 39.4,54.6 38.6,53.8 PTC8.1 | CN10.1 37,73 | 37,73 35,75 CN9.1 | F17.P$2 F16.P$1 F15.P$2 F14.P$1 F13.P$2 F18.P$1 36.1,72.1 37,73
  Bottom 0.5: v39.2,55.9 39.05,56.05 38.05,56.05 37.75,55.75 SW9.P$1
N$133  (via drill 0.6)
  Top 0.5: IC14.4 27.45,73.4 C32.1 28.85,74.75 v28.7,74.9 28.7,75.4 28.7,75.7 29,76 PTC9.2
  Bottom 0.3: IC15.12 36.97,66.12 C26.1 | D3.A 38.7,62.7 38.5,62.5 TR9.1 | R39.2 35.45,68.9
  Bottom 0.5: 35,68.9 37.3,68.9 38.2,68 38.2,67.5 38.2,67.2 | 35,68.9 34.1,68.9 32.9,70.1 29.8,70.1 29.3,70.6 29.3,74.3 v28.7,74.9 | 38.2,67.2 38,67 37.35,66.35 C26.1 | 38.2,67.2 39.5,65.9 39.5,63.5 39.2,63.2 D3.A | 35.45,68.9 35,68.9
N$134  (via drill 0.6 pad 1)
  Top 0.3: v35.2,51.8 34.5,51.8 34.35,51.95 R33.2
  Bottom 0.3: v35.2,51.8 35.75,51.25 SW9.P$3
  Bottom 0.5: SW9.P$3 SW9.P$2 35.65,52.75 35.2,53.2 35.2,56.5 35.9,57.2 35.9,59 36.75,59.85 TR9.3
N$135
  Top 0.4: 28.6,77.4 28.3,77.7 CN11.P$1
  Top 0.5: 28.6,77.4 30.8,77.4 31.45,76.75 PTC9.1
N$136  (via drill 0.6)
  Top 0.3: v72.6,56 72.6,54.6 71.6,53.6 71.6,50.2 71,49.6 70.2,49.6 70,49.8 69,49.8 68.6,49.4 67,49.4 66.1,49.4 63.4,49.4 63.2,49.2 61.9,47.9 61.9,45.82 ICSP3.1
  Bottom 0.3: v72.6,56 71.85,56.75 IC23.7
N$137  (via drill 0.6)
  Top 0.3: IC19.14 64.8,61 66.9,58.9 69.7,58.9 v71,60.2
  Bottom 0.3: IC23.3 69.55,58.75 v71,60.2
N$138  (via drill 0.6)